# Allegro board PoFA1-16.brd
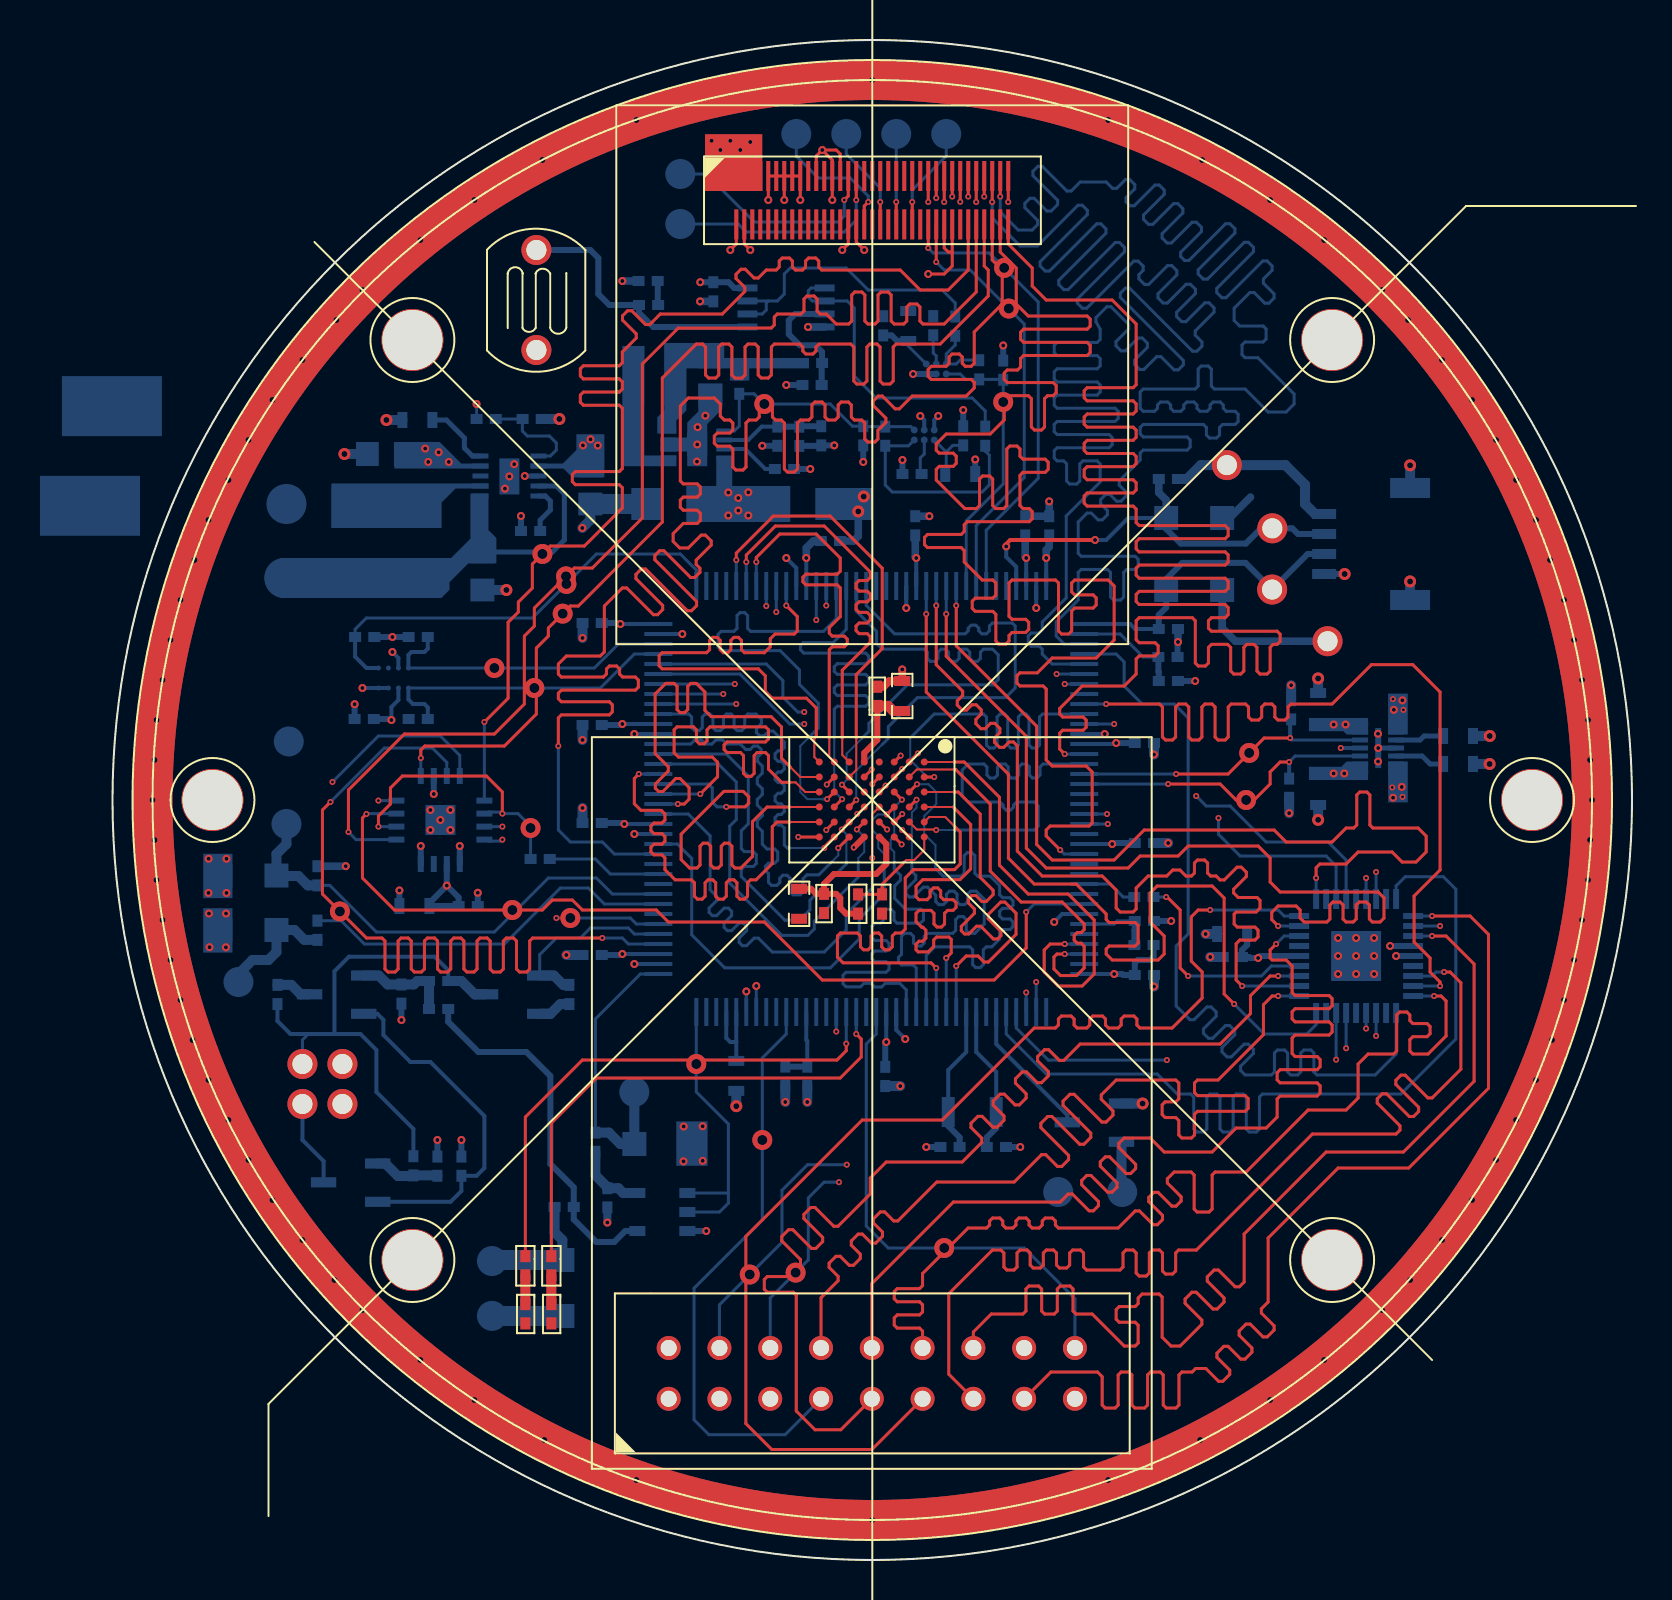
[diagram p0: board, top side]
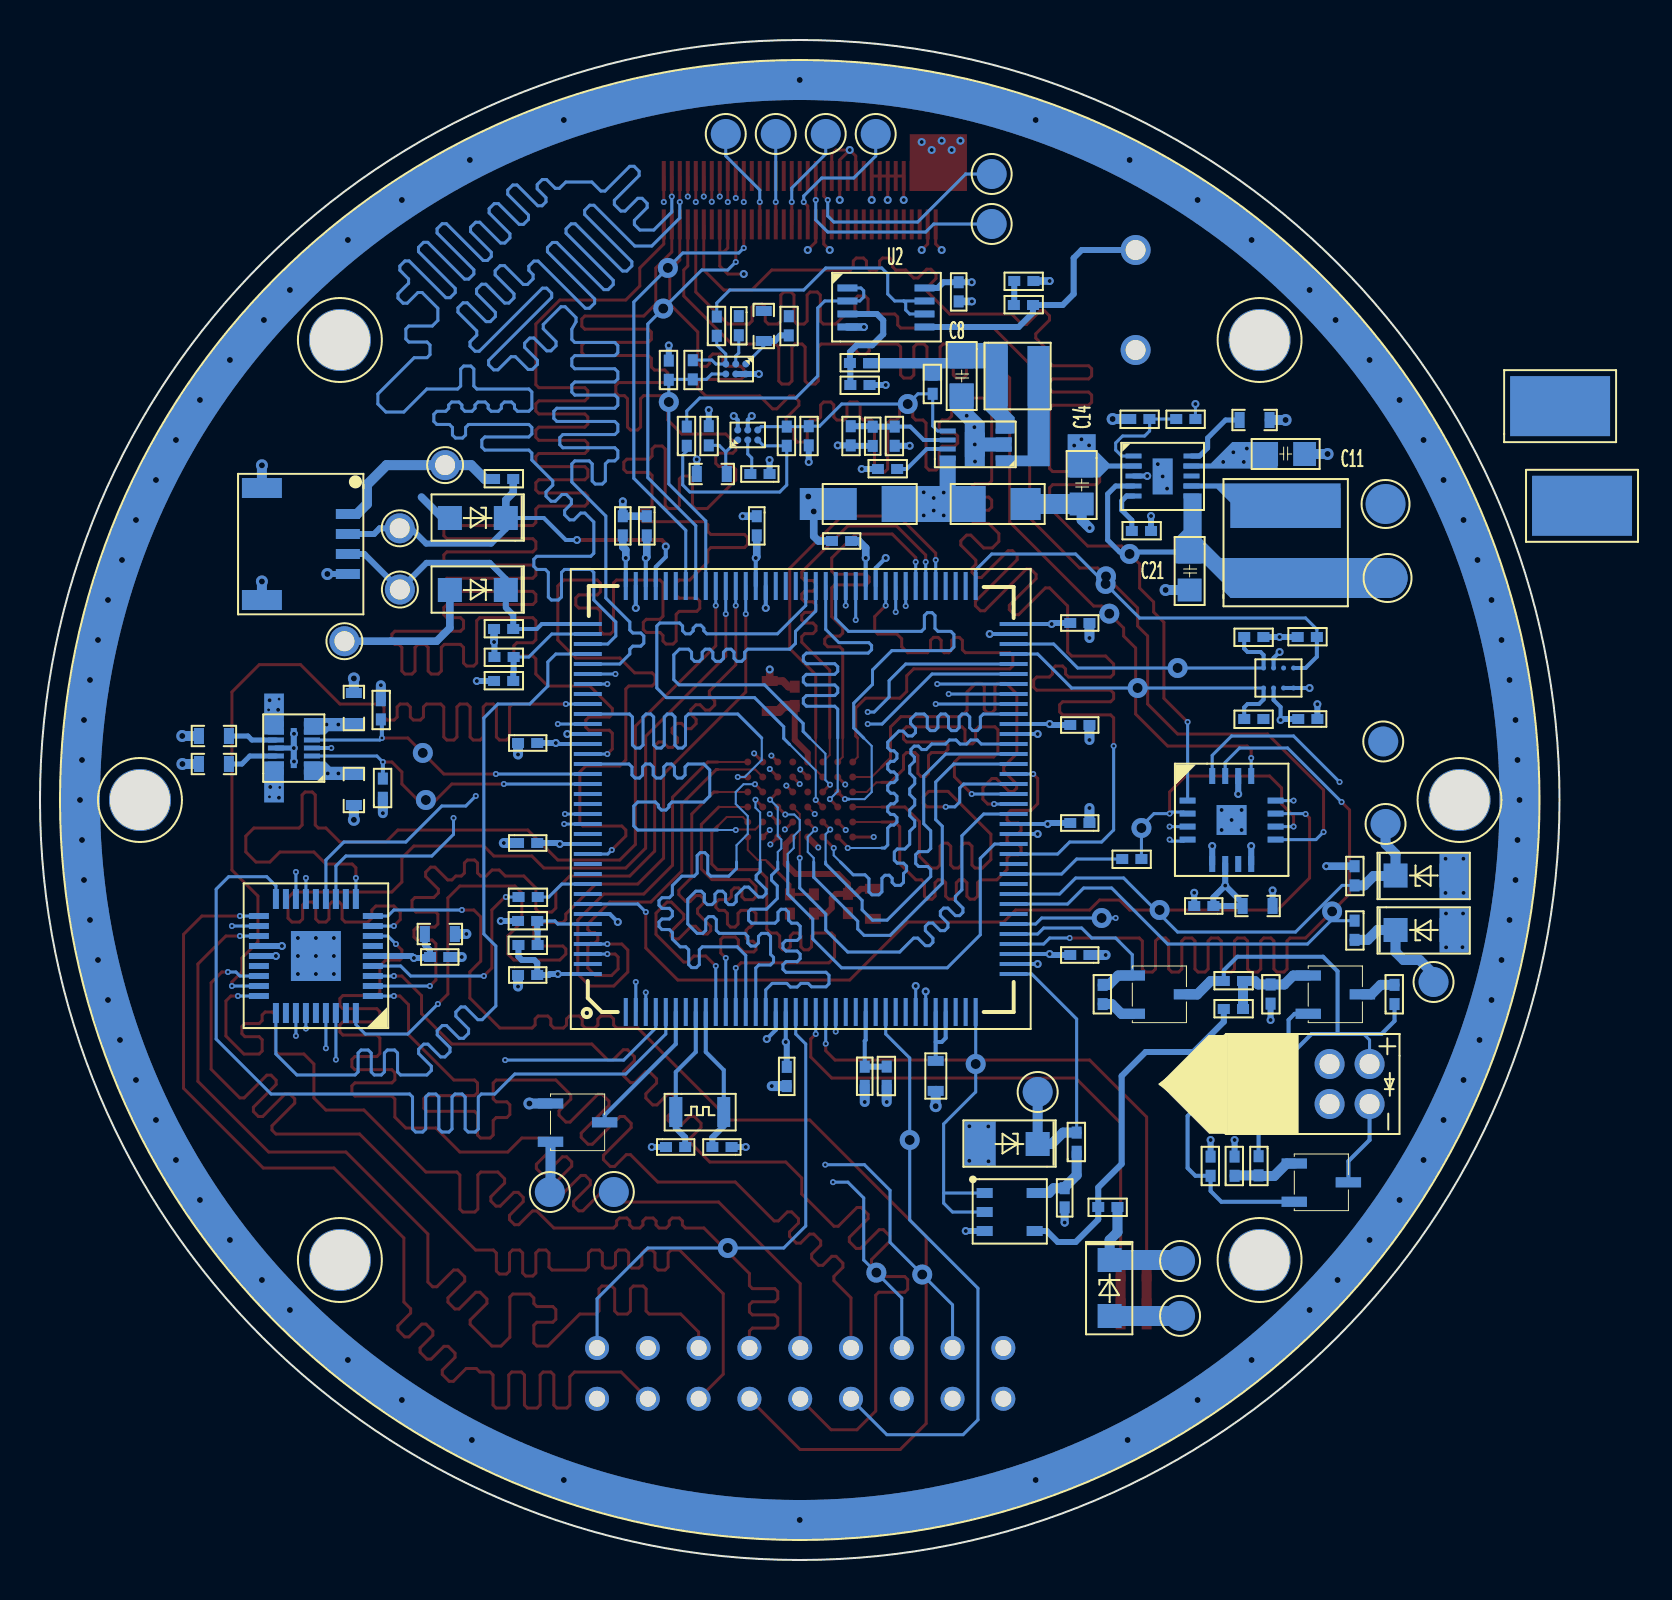
[diagram p1: board, bottom side, seen from below]

Outline 76 x 76 mm; copper layers: TOP, GND, VCC, BOTTOM. Coordinates in mm from the lower left corner of the outline.
Outline path: circle c38,38 r38

## Design rules (mm)
constraint set DEFAULT: min track width 0.15
net group BUS_SWITCH: nets BUS_SWITCH N57182
net group N00115: nets N00115 N00127
net group SYNC_SWITCH: nets N94378 SYNC_SWITCH
net group UART3_TX: nets N169854 UART3_TX
net group VPHOTO: nets N83192 VPHOTO
net group CAM1_SIGNAL: nets CAM1_D0 CAM1_D1 CAM1_D2 CAM1_D3 CAM1_D4 CAM1_D5 CAM1_D6 CAM1_D7 CAM1_HSYNC CAM1_PCLK CAM1_VSYNC
net group CAM2_SIGNAL: nets CAM2_D0 CAM2_D1 CAM2_D2 CAM2_D3 CAM2_D4 CAM2_D5 CAM2_D6 CAM2_D7 CAM2_HSYNC CAM2_PCLK CAM2_VSYNC
net group DAY_NIGHT: nets DAY_NIGHT N16602 N16606
net group DCMI_BUS: nets DCMI_D0 DCMI_D1 DCMI_D2 DCMI_D3 DCMI_D4 DCMI_D5 DCMI_D6 DCMI_D7 DCMI_HSYNC DCMI_PIXCLK DCMI_VSYNC
net group LDO22: nets LDO22 N00530 N02509 N04876 N06131 N06552 N13003 UNDER_VOLTAGE VCAP
net group MG1_DATA_BUS: nets FMC_D0 FMC_D1 FMC_D2 FMC_D3 FMC_D4 FMC_D5 FMC_D6 FMC_D7 FMC_D8 FMC_D9 FMC_D10 FMC_D11 FMC_D12 FMC_D13 FMC_D14 FMC_D15 FMC_NBL0 FMC_NBL1 FMC_NE1 FMC_NOE FMC_NWE
net group MG2_ADDR_BUS: nets FMC_A0 FMC_A1 FMC_A2 FMC_A3 FMC_A4 FMC_A5 FMC_A6 FMC_A7 FMC_A8 FMC_A9 FMC_A10 FMC_A11 FMC_A12 FMC_A13 FMC_A14 FMC_A15 FMC_A16 FMC_A17 FMC_A18 FMC_A19 FMC_A20
net group N112361: nets N66919 N67019 N67360 N69262 N70908 N112361
net group OTHER_DATA_BUS: nets DCMI_D8 DCMI_D9 DCMI_D10 DCMI_D11 DCMI_D12 DCMI_D13

## Placement (name value [footprint] x y rotation side)
C1  0.1uF  [C0402]  38.5 42.7 90 top
C2  10uF  [C0603]  39.9 42.4 90 top
C3  10uF  [C0603]  33.94 33.61 270 top
C4  0.1uF  [C0402]  35.34 33.31 270 top
C5  0.1uF  [C0402]  30.3 63.9 270 bottom
C6  0.1uF  [C0402]  41.3 62.2 270 bottom
C7  2.2uF  [C0603]  40.2 62.5 270 bottom
C8  10uF  [C0805]  30.5 60.25 270 bottom
C9  1uF  [C0603]  16.05 56.6 180 bottom
C10  33pF  [C0402]  34.1 55.7 90 bottom
C11  10uF  [C0805]  14.75 54.7 180 bottom
C12  2.2uF  [C0603]  43.2 53.9 180 bottom
C13  0.1uF  [C0402]  39.5 54.55 0 bottom
C14  10uF  [C0805]  24.5 54.8 270 bottom
C15  22uF  [C1206]  32.9 53.6 0 bottom
C16  22uF  [C1206]  29.7 52 180 bottom
C17  0.1uF  [C0402]  47.1 52.2 270 bottom
C18  0.1uF  [C0402]  45.9 52.2 270 bottom
C19  0.1uF  [C0402]  40.4 52.2 270 bottom
C20  0.1uF  [C0402]  36.4 50.7 180 bottom
C21  10uF  [C0805]  19.1 50.5 270 bottom
C22  0.1uF  [C0402]  23.5 47.1 0 bottom
C23  1uF  [C0603]  60.7 43.4 270 bottom
C24  0.1uF  [C0402]  12.1 42.3 0 bottom
C25  0.1uF  [C0402]  23.5 42 0 bottom
C26  1uF  [C0603]  66.5 41.6 0 bottom
C27  0.1uF  [C0402]  52.1 40.6 180 bottom
C28  1uF  [C0603]  66.5 40.2 0 bottom
C29  1uF  [C0603]  59.9 37.7 90 bottom
C30  0.1uF  [C0402]  23.5 37.1 0 bottom
C31  0.1uF  [C0402]  52.1 35.6 180 bottom
C32  0.1uF  [C0402]  17.3 32.95 0 bottom
C33  10uF  [C0603]  15.9 32.3 180 bottom
C34  10uF  [C0603]  56.8 30.9 180 bottom
C35  0.1uF  [C0402]  23.5 30.5 0 bottom
C36  0.1uF  [C0402]  56.5 29.9 180 bottom
C37  0.1uF  [C0402]  52.1 29 180 bottom
C38  0.1uF  [C0402]  34.5 23.7 90 bottom
C39  0.1uF  [C0402]  38.4 23.69 90 bottom
C40  12pF  [C0402]  44.7 20.4 180 bottom
C41  12pF  [C0402]  41.4 20.9 0 bottom
C42  0.1uF  [C0402]  25 18.6 270 bottom
D1  LED  [LED0402]  20.4 15.2 270 top
D2  LED  [LED0402]  21.7 15.2 270 top
D3  PTVS3V3S1UTR  [SOD123W]  52.7 52.1 0 bottom
D4  PTVS3V3S1UTR  [SOD123W]  52.7 48.5 0 bottom
D5  PTVS3V3S1UTR  [SOD123W]  8.2 34.22 180 bottom
D6  PTVS3V3S1UTR  [SOD123W]  8.2 31.5 180 bottom
D7  PTVS3V3S1UTR  [SOD123W]  26.1 20.8 0 bottom
D8  PTVS3V3S1UTR  [SOD123W]  22.5 15 270 bottom
J1  DF40HC(3.0)-70DS-0.4V(51)  [DF40HC-70DS]  31.2 69.2 0 top
J2  Header2x9-2.54mm  [HEADER2X9-2D54]  27.82 10.6 0 top
J3  CONN_SH1.0mm_4P  [CONN_SH1D0MM_4P]  60.6 52.3 270 bottom
L1  4.7uH  [L3015]  28.1 59.2 180 bottom
L2  10uH  [L47473]  13.7 49.1 90 bottom
L3  1uH  [L0603]  31.6 25.01 270 bottom
LD1  LaserDiode  [AXIAL_2D0_4P]  9.5 24.8 270 bottom
NOREF  -  []  15 61 0 top
NOREF#2  -  [unnamed#2]  61 15 0 top
NOREF#3  -  [unnamed#2]  71 38 0 top
NOREF#4  -  [unnamed#2]  15 15 0 top
NOREF#5  -  []  5 38 0 top
NOREF#6  -  [unnamed#2]  61 61 0 top
NOREF#7  -  []  15 15 90 top
NOREF#8  -  [unnamed#2]  5 38 0 top
NOREF#9  -  [unnamed#2]  15 61 0 top
NOREF#10  -  []  69.87 58.69 0 top
Q1  FH3415A  [SOT23-3]  21.8 29.7 270 bottom
Q2  2SC1815  [SOT23-3]  13 29.7 270 bottom
Q3  2SC1815  [SOT23-3]  13.7 20.3 270 bottom
R1  GL7549  [AXIAL-5D0]  21.2 60.5 90 top
R2  0  [R0402]  37.54 32.31 90 top
R3  DNP  [R0402]  38.74 32.31 90 top
R4  2K  [R0402]  20.4 12.8 270 top
R5  2K  [R0402]  21.7 12.8 270 top
R6  68K  [R0402]  26.3 64.2 0 bottom
R7  0  [R0402]  27.3 62.5 180 bottom
R8  36K  [R0402]  41.9 61.2 90 bottom
R9  3.3K  [R0402]  38.8 62.2 270 bottom
R10  1M  [R0402]  35.5 59.6 180 bottom
R11  10K  [R0402]  44.3 59 90 bottom
R12  147K  [R0402]  43.6 60 270 bottom
R13  10K  [R0402]  31.1 58.3 90 bottom
R14  1M  [R0402]  34.5 59 0 bottom
R15  1M  [R0402]  20.5 57.3 0 bottom
R16  2.26M  [R0402]  18.2 57.3 0 bottom
R17  36K  [R0402]  43.4 55.7 90 bottom
R18  3.3K  [R0402]  42.8 56.7 270 bottom
R19  147K  [R0402]  38.4 55.7 90 bottom
R20  10K  [R0402]  37.8 56.7 270 bottom
R21  1M  [R0402]  35.7 56.7 270 bottom
R22  562K  [R0402]  33 55.7 90 bottom
R23  10K  [R0402]  34.1 54.3 180 bottom
R24  10K  [R0402]  53.3 53.8 180 bottom
R25  200K  [R0402]  21.4 51.2 180 bottom
R26  10K  [R0402]  53.3 46.3 180 bottom
R27  10K  [R0402]  13.11 45.9 180 bottom
R28  10K  [R0402]  14.8 46.4 0 bottom
R29  10K  [R0402]  52.3 45.4 0 bottom
R30  DNP  [R0402]  53.3 43.7 180 bottom
R31  100K  [R0402]  59.2 43 270 bottom
R32  10K  [R0402]  14.8 42.3 0 bottom
R33  100K  [R0402]  58.6 38.1 90 bottom
R34  1K  [R0402]  20.9 35.3 0 bottom
R35  10K  [R0402]  10.5 34.7 270 bottom
R36  1K  [R0402]  51.09 33.4 0 bottom
R37  DNP  [R0402]  52.1 31.7 180 bottom
R38  10K  [R0402]  10.5 31.98 270 bottom
R39  10K  [R0402]  51.1 31 0 bottom
R40  510  [R0402]  16.8 28.7 180 bottom
R41  10K  [R0402]  22.6 27.79 90 bottom
R42  510  [R0402]  14.7 28.79 270 bottom
R43  40  [R0402]  8 27.79 90 bottom
R44  510  [R0402]  16.8 27.3 180 bottom
R45  10K  [R0402]  33.4 23.7 90 bottom
R46  10K  [R0402]  23.9 20.4 90 bottom
R47  40  [R0402]  17.2 19.2 90 bottom
R48  510  [R0402]  16 19.2 90 bottom
R49  510  [R0402]  15.3 20.2 270 bottom
R50  10K  [R0402]  22.1 17.9 0 bottom
TP1  SMD TP  [TP_SMD_OD1D5]  41.7 71.3 180 bottom
TP2  SMD TP  [TP_SMD_OD1D5]  39.2 71.3 180 bottom
TP3  SMD TP  [TP_SMD_OD1D5]  36.7 71.3 180 bottom
TP4  SMD TP  [TP_SMD_OD1D5]  34.2 71.3 180 bottom
TP5  SMD TP  [TP_SMD_OD1D5]  28.4 69.3 180 bottom
TP6  SMD TP  [TP_SMD_OD1D5]  28.4 66.8 180 bottom
TP7  SOLDER POINT  [TP_SMD_3D0X5D0]  -0.03 57.69 90 bottom
TP8  SMD TP  [TP_THR_ID1D0]  55.74 54.75 180 bottom
TP9  Solar Cell V-  [TP_SMD_OD2D0]  8.7 52.8 180 bottom
TP10  SOLDER POINT  [TP_SMD_3D0X5D0]  -1.13 52.71 270 bottom
TP11  SMD TP  [TP_THR_ID1D0]  58.01 51.59 180 bottom
TP12  Solar Cell V+  [TP_SMD_OD2D0]  8.6 49.1 180 bottom
TP13  SMD TP  [TP_THR_ID1D0]  58 48.52 180 bottom
TP14  SMD TP  [TP_THR_ID1D0]  60.77 45.94 180 bottom
TP15  SMD TP  [TP_SMD_OD1D5]  8.82 40.93 180 bottom
TP16  SMD TP  [TP_SMD_OD1D5]  8.7 36.8 180 bottom
TP17  SMD TP  [TP_SMD_OD1D5]  6.3 28.9 180 bottom
TP18  SMD TP  [TP_SMD_OD1D5]  26.1 23.4 180 bottom
TP19  SMD TP  [TP_SMD_OD1D5]  50.5 18.4 180 bottom
TP20  SMD TP  [TP_SMD_OD1D5]  47.3 18.4 180 bottom
TP21  SMD TP  [TP_SMD_OD1D5]  18.98 14.95 180 bottom
TP22  SMD TP  [TP_SMD_OD1D5]  18.98 12.21 180 bottom
U1  IS66WVE2M16EBLL-70BLI-TR  [TFBGA-48]  40.6 39.9 270 top
U2  ADA4051-2ARMZ  [RM-8]  32 63.6 270 bottom
U3  ADCMP380-1ACBZ-RL7  [WLCSP-6]  40.7 59.8 270 bottom
U4  ADCMP380-1ACBZ-RL7  [WLCSP-6]  41.1 56 90 bottom
U5  LTC3539EDCB#PBF  [DFN-8]  30.6 55.1 90 bottom
U6  LTC3105EDD#PBF  [DFN-10]  18.41 55.2 270 bottom
U7  HDC1010YPAR  [DSBGA-8]  14.8 43.6 90 bottom
U8  TPS22976ADPUR  [WSON-14]  64.2 39.4 90 bottom
U9  STM32L496ZGT6  [LQFP-144]  47.9 28.1 180 bottom
U10  MAX4754AEBE+T  [QFN-16]  16.4 37 180 bottom
U11  MAX4761ETX+T  [TQFN-36]  62.2 30.2 0 bottom
U12  BAT754C  [SOT23-3]  50.9 23.3 270 bottom
U13  SN74LVC1G08QDBVRQ1  [SOT-23-5]  29 15.9 180 bottom
Y1  32.768KHz  [CRYSTAL_3215]  44.2 22.4 180 bottom

## Library data of the parts
C1 C4-C6 C13 C17-C20 C22 C24 C25 C27 C30-C32 C35-C39 C42 = CAP NP: signal model: DEFAULT_CAPACITOR_100000pF_2_1
C2 C3 C8 C11 C14 C21 C33 C34 = CAP NP: signal model: DEFAULT_CAPACITOR_1e+07pF_2_1
C7 C12 = CAP NP: signal model: DEFAULT_CAPACITOR_2.2e+06pF_2_1
C9 C23 C26 C28 C29 = CAP NP: signal model: DEFAULT_CAPACITOR_1e+06pF_2_1
C10 = CAP NP: signal model: DEFAULT_CAPACITOR_33.000000pF_2_1
C15 C16 = CAP NP: signal model: DEFAULT_CAPACITOR_2.2e+07pF_2_1
C40 C41 = CAP NP: signal model: DEFAULT_CAPACITOR_12.000000pF_2_1
D1 D2 = LED
D3-D8 = DIODE TVS
J1 = Header2x35
J2 = Header2x9
J3 = CONN_SH1.0mm_4P
L1 = INDUCTOR: signal model: DEFAULT_INDUCTOR_4700nH_2_1
L2 = INDUCTOR: signal model: DEFAULT_INDUCTOR_10000nH_2_1
L3 = INDUCTOR: signal model: DEFAULT_INDUCTOR_1000nH_2_1
LD1 = LaserDiode
Q1 = FH3415A
Q2 Q3 = 2SC1815
R1 = RESISTOR VAR 2
R2 R10 R14 R15 R21 = R: signal model: DEFAULT_RESISTOR_0.001OHM_2_1
R3 R30 R37 = R
R4 R5 = R: signal model: DEFAULT_RESISTOR_2000OHM_2_1
R6 = R: signal model: DEFAULT_RESISTOR_68000OHM_2_1
R7 = R: signal model: R_R0402_0_0
R8 R17 = R: signal model: DEFAULT_RESISTOR_36000OHM_2_1
R9 R18 = R: signal model: DEFAULT_RESISTOR_3300OHM_2_1
R11 R13 R20 R23 R24 R26-R29 R32 R35 R38 R39 R41 R45 R46 R50 = R: signal model: DEFAULT_RESISTOR_10000OHM_2_1
R12 R19 = R: signal model: DEFAULT_RESISTOR_147000OHM_2_1
R16 = R: signal model: DEFAULT_RESISTOR_0.00226OHM_2_1
R22 = R: signal model: DEFAULT_RESISTOR_562000OHM_2_1
R25 = R: signal model: DEFAULT_RESISTOR_200000OHM_2_1
R31 R33 = R: signal model: DEFAULT_RESISTOR_100000OHM_2_1
R34 R36 = R: signal model: DEFAULT_RESISTOR_1000.000000OHM_2_1
R40 R42 R44 R48 R49 = R: signal model: DEFAULT_RESISTOR_510.000000OHM_2_1
R43 R47 = R: signal model: DEFAULT_RESISTOR_40.000000OHM_2_1
TP1-TP6 TP8 TP11 TP13-TP22 = T POINT R
TP7 TP10 = T POINT S
TP9 TP12 = T POINT A
U1 = IS66WVE2M16EBLL-70BLI-TR
U2 = ADA4051-2ARMZ
U3 U4 = ADCMP380-1ACBZ-RL7
U5 = LTC3539EDCB#PBF
U6 = LTC3105EDD#PBF
U7 = HDC1010YPAR
U8 = TPS22976ADPUR
U9 = STM32L496ZGT6
U10 = MAX4754AEBE+T
U11 = MAX4761EBX+T
U12 = BAT754C
U13 = SN74LVC1G08QDBVRQ1
Y1 = CRYSTAL

## Footprints (pads in the part's own frame, mm; a bottom-side part is the same pattern mirrored in y, then rotated)
AXIAL-5D0
  round 1.5 hole 1: 1(0,0) 2(5,0)
AXIAL_2D0_4P
  round 1.5 hole 1: 1(0,0) 2(2,0) 3(0,-2) 4(2,-2)
C0402
  rect 0.6x0.5 smd: 1(0.01,0.25) 2(0.97,0.25)
C0603
  rect 0.5x0.8 smd: 1(0.05,0.4) 2(1.55,0.4)
C0805
  rect 1.14x1.2 smd: 1(0.1,0.6) 2(2,0.6)
C1206
  rect 1.5x1.6 smd: 1(0.2,0.8) 2(3,0.8)
CONN_SH1D0MM_4P
  rect 0.5x1.2 smd: 1(0,0) 2(1,0) 3(2,0) 4(3,0)
  rect 1x2 smd: 5(-1.3,-4.3) 6(4.3,-4.3)
CRYSTAL_3215
  rect 0.65x1.5 smd: 1(0,0) 2(2.4,0)
DF40HC-70DS
  rect 0.2x1.5 smd: 1(0,0) 2(0.4,0) 3(0.8,0) 4(1.2,0) 5(1.6,0) 6(2,0) 7(2.4,0) 8(2.8,0) 9(3.2,0) 10(3.6,0) 11(4,0) 12(4.4,0) 13(4.8,0) 14(5.2,0) 15(5.6,0) 16(6,0) 17(6.4,0) 18(6.8,0) 19(7.2,0) 20(7.6,0) 21(8,0) 22(8.4,0) 23(8.8,0) 24(9.2,0) 25(9.6,0) 26(10,0) 27(10.4,0) 28(10.8,0) 29(11.2,0) 30(11.6,0) 31(12,0) 32(12.4,0) 33(12.8,0) 34(13.2,0) 35(13.6,0) 36(13.6,-2.42) 37(13.2,-2.42) 38(12.8,-2.42) 39(12.4,-2.42) 40(12,-2.42) 41(11.6,-2.42) 42(11.2,-2.42) 43(10.8,-2.42) 44(10.4,-2.42) 45(10,-2.42) 46(9.6,-2.42) 47(9.2,-2.42) 48(8.8,-2.42) 49(8.4,-2.42) 50(8,-2.42) 51(7.6,-2.42) 52(7.2,-2.42) 53(6.8,-2.42) 54(6.4,-2.42) 55(6,-2.42) 56(5.6,-2.42) 57(5.2,-2.42) 58(4.8,-2.42) 59(4.4,-2.42) 60(4,-2.42) 61(3.6,-2.42) 62(3.2,-2.42) 63(2.8,-2.42) 64(2.4,-2.42) 65(2,-2.42) 66(1.6,-2.42) 67(1.2,-2.42) 68(0.8,-2.42) 69(0.4,-2.42) 70(0,-2.42)
DFN-8
  rect 0.25x0.8 smd: 1(0,-2.8) 2(0.45,-2.8) 3(0.9,-2.8) 4(1.35,-2.8) 5(1.35,0) 6(0.9,0) 7(0.45,0) 8(0,0)
  rect 1.2x1 smd: 9(0.676,-1.355)
DFN-10
  rect 0.25x0.8 smd: 1(0,-2.9) 2(0.5,-2.9) 3(1,-2.9) 4(1.5,-2.9) 5(2,-2.9) 6(2,0) 7(1.5,0) 8(1,0) 9(0.5,0) 10(0,0)
  rect 1.8x1 smd: 11(1.022,-1.444)
DSBGA-8
  round 0.25 smd: A1(0,0) A2(1,0) B1(0,-0.5) B2(1,-0.5) C1(0,-1) C2(1,-1) D1(0,-1.5) D2(1,-1.5)
HEADER2X9-2D54
  round 1.2 hole 0.8: 1(0,-2.54) 2(2.54,-2.54) 3(5.08,-2.54) 4(7.62,-2.54) 5(10.16,-2.54) 6(12.7,-2.54) 7(15.24,-2.54) 8(17.78,-2.54) 9(20.32,-2.54) 10(20.32,0) 11(17.78,0) 12(15.24,0) 13(12.7,0) 14(10.16,0) 15(7.62,0) 16(5.08,0) 17(2.54,0) 18(0,0)
L0603
  rect 0.5x0.8 smd: 1(0.05,0.4) 2(1.55,0.4)
L3015
  rect 1x3 smd: 1(0,0) 2(2,0)
L47473
  rect 2x5.5 smd: 1(0,0) 2(3.5,0)
LED0402
  rect 0.6x0.5 smd: 1(0.01,0.25) 2(0.97,0.25)
LQFP-144
  rect 0.2x1.4 smd: 1(1.2,-0.7) 2(1.7,-0.7) 3(2.2,-0.7) 4(2.7,-0.7) 5(3.2,-0.7) 6(3.7,-0.7) 7(4.2,-0.7) 8(4.7,-0.7) 9(5.2,-0.7) 10(5.7,-0.7) 11(6.2,-0.7) 12(6.7,-0.7) 13(7.2,-0.7) 14(7.7,-0.7) 15(8.2,-0.7) 16(8.7,-0.7) 17(9.2,-0.7) 18(9.7,-0.7) 19(10.2,-0.7) 20(10.7,-0.7) 21(11.2,-0.7) 22(11.7,-0.7) 23(12.2,-0.7) 24(12.7,-0.7) 25(13.2,-0.7) 26(13.7,-0.7) 27(14.2,-0.7) 28(14.7,-0.7) 29(15.2,-0.7) 30(15.7,-0.7) 31(16.2,-0.7) 32(16.7,-0.7) 33(17.2,-0.7) 34(17.7,-0.7) 35(18.2,-0.7) 36(18.7,-0.7) 73(18.7,20.6) 74(18.2,20.6) 75(17.7,20.6) 76(17.2,20.6) 77(16.7,20.6) 78(16.2,20.6) 79(15.7,20.6) 80(15.2,20.6) 81(14.7,20.6) 82(14.2,20.6) 83(13.7,20.6) 84(13.2,20.6) 85(12.7,20.6) 86(12.2,20.6) 87(11.7,20.6) 88(11.2,20.6) 89(10.7,20.6) 90(10.2,20.6) 91(9.7,20.6) 92(9.2,20.6) 93(8.7,20.6) 94(8.2,20.6) 95(7.7,20.6) 96(7.2,20.6) 97(6.7,20.6) 98(6.2,20.6) 99(5.7,20.6) 100(5.2,20.6) 101(4.7,20.6) 102(4.2,20.6) 103(3.7,20.6) 104(3.2,20.6) 105(2.7,20.6) 106(2.2,20.6) 107(1.7,20.6) 108(1.2,20.6)
  rect 1.4x0.2 smd: 37(20.6,1.2) 38(20.6,1.7) 39(20.6,2.2) 40(20.6,2.7) 41(20.6,3.2) 42(20.6,3.7) 43(20.6,4.2) 44(20.6,4.7) 45(20.6,5.2) 46(20.6,5.7) 47(20.6,6.2) 48(20.6,6.7) 49(20.6,7.2) 50(20.6,7.7) 51(20.6,8.2) 52(20.6,8.7) 53(20.6,9.2) 54(20.6,9.7) 55(20.6,10.2) 56(20.6,10.7) 57(20.6,11.2) 58(20.6,11.7) 59(20.6,12.2) 60(20.6,12.7) 61(20.6,13.2) 62(20.6,13.7) 63(20.6,14.2) 64(20.6,14.7) 65(20.6,15.2) 66(20.6,15.7) 67(20.6,16.2) 68(20.6,16.7) 69(20.6,17.2) 70(20.6,17.7) 71(20.6,18.2) 72(20.6,18.7) 109(-0.7,18.7) 110(-0.7,18.2) 111(-0.7,17.7) 112(-0.7,17.2) 113(-0.7,16.7) 114(-0.7,16.2) 115(-0.7,15.7) 116(-0.7,15.2) 117(-0.7,14.7) 118(-0.7,14.2) 119(-0.7,13.7) 120(-0.7,13.2) 121(-0.7,12.7) 122(-0.7,12.2) 123(-0.7,11.7) 124(-0.7,11.2) 125(-0.7,10.7) 126(-0.7,10.2) 127(-0.7,9.7) 128(-0.7,9.2) 129(-0.7,8.7) 130(-0.7,8.2) 131(-0.7,7.7) 132(-0.7,7.2) 133(-0.7,6.7) 134(-0.7,6.2) 135(-0.7,5.7) 136(-0.7,5.2) 137(-0.7,4.7) 138(-0.7,4.2) 139(-0.7,3.7) 140(-0.7,3.2) 141(-0.7,2.7) 142(-0.7,2.2) 143(-0.7,1.7) 144(-0.7,1.2)
QFN-16
  rect 0.8x0.3 smd: 1(-2.2,0.97) 2(-2.2,0.32) 3(-2.2,-0.33) 4(-2.2,-0.98) 9(2.2,-0.98) 10(2.2,-0.33) 11(2.2,0.32) 12(2.2,0.97)
  rect 0.3x0.8 smd: 5(-0.97,-2.2) 6(-0.32,-2.2) 7(0.33,-2.2) 8(0.98,-2.2) 13(0.98,2.2) 14(0.33,2.2) 15(-0.32,2.2) 16(-0.97,2.2)
  rect 1.5x1.5 smd: EPAD(0,0)
R0402
  rect 0.6x0.5 smd: 1(0.01,0.25) 2(0.97,0.25)
RM-8
  rect 0.35x1 smd: 1(-0.001,-3.615) 2(0.649,-3.615) 3(1.299,-3.615) 4(1.949,-3.615) 5(1.949,0.241) 6(1.299,0.241) 7(0.649,0.241) 8(-0.001,0.241)
SOD123W
  rect 1.2x1.2 smd: 1(0,0) 2(2.8,0)
SOT23-3
  rect 0.51x1.27 smd: 1(0.476,0.434) 2(2.391,0.434) 3(1.415,3.142)
SOT-23-5
  rect 0.8x0.5 smd: 1(0.25,2.45) 2(0.25,1.5) 3(0.25,0.55) 4(2.75,0.55) 5(2.75,2.45)
TFBGA-48
  round 0.35 smd: A1(0,0) A2(0.75,0) A3(1.5,0) A4(2.25,0) A5(3,0) A6(3.75,0) B1(0,-0.75) B2(0.75,-0.75) B3(1.5,-0.75) B4(2.25,-0.75) B5(3,-0.75) B6(3.75,-0.75) C1(0,-1.5) C2(0.75,-1.5) C3(1.5,-1.5) C4(2.25,-1.5) C5(3,-1.5) C6(3.75,-1.5) D1(0,-2.25) D2(0.75,-2.25) D3(1.5,-2.25) D4(2.25,-2.25) D5(3,-2.25) D6(3.75,-2.25) E1(0,-3) E2(0.75,-3) E3(1.5,-3) E4(2.25,-3) E5(3,-3) E6(3.75,-3) F1(0,-3.75) F2(0.75,-3.75) F3(1.5,-3.75) F4(2.25,-3.75) F5(3,-3.75) F6(3.75,-3.75) G1(0,-4.5) G2(0.75,-4.5) G3(1.5,-4.5) G4(2.25,-4.5) G5(3,-4.5) G6(3.75,-4.5) H1(0,-5.25) H2(0.75,-5.25) H3(1.5,-5.25) H4(2.25,-5.25) H5(3,-5.25) H6(3.75,-5.25)
TP_SMD_3D0X5D0
  rect 3x5 smd: 1(0,0)
TP_SMD_OD1D5
  round 1.5 smd: 1(0,0)
TP_SMD_OD2D0
  round 2 smd: 1(0,0)
TP_THR_ID1D0
  round 1.5 hole 1: 1(0,0)
TQFN-36
  rect 1x0.3 smd: 1(-2.85,2) 2(-2.85,1.5) 3(-2.85,1) 4(-2.85,0.5) 5(-2.85,0) 6(-2.85,-0.5) 7(-2.85,-1) 8(-2.85,-1.5) 9(-2.85,-2) 19(2.85,-2) 20(2.85,-1.5) 21(2.85,-1) 22(2.85,-0.5) 23(2.85,0) 24(2.85,0.5) 25(2.85,1) 26(2.85,1.5) 27(2.85,2)
  rect 0.3x1 smd: 10(-2,-2.85) 11(-1.5,-2.85) 12(-1,-2.85) 13(-0.5,-2.85) 14(0,-2.85) 15(0.5,-2.85) 16(1,-2.85) 17(1.5,-2.85) 18(2,-2.85) 28(2,2.85) 29(1.5,2.85) 30(1,2.85) 31(0.5,2.85) 32(0,2.85) 33(-0.5,2.85) 34(-1,2.85) 35(-1.5,2.85) 36(-2,2.85)
  rect 2.5x2.5 smd: EPAD(0,0)
unnamed#2
  round 3.1 hole 3 unplated: (0,0)
WLCSP-6
  round 0.35 smd: A1(0,0) A2(0.5,0) B1(0,-0.5) B2(0.5,-0.5) C1(0,-1) C2(0.5,-1)
WSON-14
  rect 0.25x0.8 smd: 1(0,-1.8) 2(0.4,-1.8) 3(0.8,-1.8) 4(1.2,-1.8) 5(1.6,-1.8) 6(2,-1.8) 7(2.4,-1.8) 8(2.4,0) 9(2,0) 10(1.6,0) 11(1.2,0) 12(0.8,0) 13(0.4,0) 14(0,0)
  rect 2x0.3 smd: EPAD(1.197,-0.895)

## Nets
GND: C1.2 C2.2 C3.2 C4.2 C5.2 C6.1 C7.1 C8.2 C9.2 C11.2 C12.1 C13.1 C14.2 C15.2 C16.2 C17.1 C18.1 C19.1 C20.1 C21.2 C22.1 C23.1 C24.1 C25.1 C26.2 C27.1 C28.2 C29.1 C30.1 C31.1 C32.2 C33.2 C34.2 C35.1 C36.2 C37.1 C38.1 C39.1 C40.1 C41.1 C42.2 D3.2 D4.2 D5.2 D6.2 D7.2 D8.2 J1.5 J1.6 J1.7 J1.8 J1.9 J1.11 J1.13 J1.14 J1.43 J1.44 J1.55 J1.56 J1.69 J1.70 J2.18 J3.4 J3.5 J3.6 R3.1 R6.1 R14.1 R15.2 R22.1 R23.1 R25.2 R30.1 R31.1 R33.1 R37.1 R42.2 R47.2 R48.2 TP9.1(TP) TP10.1(TP) TP14.1(TP) TP15.1(TP) TP20.1(TP) TP22.1(TP) U1.D1 U1.E6 U2.4(V-) U3.A2 U3.B2 U4.A2 U4.B2 U5.2 U5.3 U5.9 U6.3 U6.11 U7.B2 U7.C1 U7.D1 U8.11 U8.EPAD U9.16 U9.30(VSSA) U9.31 U9.38 U9.51 U9.61 U9.83 U9.94 U9.107 U9.120 U9.130 U9.138 U9.143 U10.5 U10.8 U10.14 U10.EPAD U11.22 U11.23 U11.EPAD U13.3
VDD33: C1.1 C2.1 C3.1 C4.1 C10.1 C15.1 C16.1 C17.2 C18.2 C19.2 C20.2 C22.2 C23.2 C24.2 C25.2 C27.2 C29.2 C30.2 C31.2 C32.1 C33.1 C34.1 C35.2 C36.1 C37.2 C39.2 C42.1 J3.1 L3.2 Q1.2(S) R1.1 R2.1 R4.2 R5.2 R9.1 R11.2 R21.2 R24.1 R26.1 R27.1 R28.1 R29.2 R32.1 R35.1 R39.2 R41.1 R45.1 R46.1 TP8.1(TP) U1.D6 U1.E1 U5.8(VOUT) U7.B1(VDD) U8.1 U8.2 U8.4 U8.6 U8.7 U9.17 U9.39 U9.52 U9.62 U9.72 U9.84 U9.95 U9.106 U9.108 U9.121 U9.131 U9.144 U10.6(V+) U11.5(V+) U12.1 U13.5
VDD_CAM1: J2.1 U8.13 U8.14
VDD_CAM2: J1.1 J1.2 J1.3 J1.4 U8.8 U8.9(VOUT2#9)
VSS: U9.71
BUS_SWITCH: R36.1 U9.135
CAM1_D0: J2.15 U11.1
CAM1_D1: J2.5 U11.3
CAM1_D2: J2.14 U11.7
CAM1_D3: J2.6 U11.9
CAM1_D4: J2.13 U11.27
CAM1_D5: J2.7 U11.25
CAM1_D6: J2.12 U11.21
CAM1_D7: J2.8 U11.19
CAM1_HSYNC: J2.3 U10.16
CAM1_PCLK: J2.11 U10.4
CAM1_PWDN: J2.10 U9.18
CAM1_PWR_EN: R33.2 U8.3 U9.125
CAM1_RST: J2.4 U9.27
CAM1_VSYNC: J2.2(VSYNC) U10.12
CAM2_D0: J1.26 U11.33
CAM2_D1: J1.25 U11.34
CAM2_D2: J1.28 U11.12
CAM2_D3: J1.27 U11.13
CAM2_D4: J1.30 U11.31
CAM2_D5: J1.29 U11.30
CAM2_D6: J1.32 U11.16
CAM2_D7: J1.31 U11.15
CAM2_HSYNC: J1.39 U10.13
CAM2_KEY1: J1.48 TP1.1(TP)
CAM2_KEY2: J1.50 TP2.1(TP)
CAM2_KEY3: J1.52 TP3.1(TP)
CAM2_KEY4: J1.54 TP4.1(TP)
CAM2_PCLK: J1.41 U10.1
CAM2_PWR_EN: R31.2 U8.5 U9.124
CAM2_RS232_RX: J1.15 TP5.1(TP)
CAM2_RS232_TX: J1.16 TP6.1(TP)
CAM2_VSYNC: J1.40 U10.9
DAY_NIGHT: R11.1 R12.2 U3.C2 U9.100
DCMI_D0: U9.96 U11.36
DCMI_D1: U9.97 U11.2
DCMI_D2: U9.98 U11.8
DCMI_D3: U9.99 U11.10
DCMI_D4: U9.112 U11.28
DCMI_D5: U9.117 U11.26
DCMI_D6: U9.4 U11.20
DCMI_D7: U9.5 U11.18
DCMI_D8: J1.34 U9.111
DCMI_D9: J1.33 U9.113
DCMI_D10: J1.36 U9.122
DCMI_D11: J1.35 U9.22
DCMI_D12: J1.38 U9.49
DCMI_D13: J1.37 U9.132
DCMI_HSYNC: U9.40 U10.15
DCMI_PIXCLK: U9.42 U10.3
DCMI_VSYNC: U9.137 U10.11
FMC_A0: U1.A3 U9.10
FMC_A1: U1.A4 U9.11
FMC_A2: U1.A5 U9.12
FMC_A3: U1.B3 U9.13
FMC_A4: U1.B4 U9.14
FMC_A5: U1.C3 U9.15
FMC_A6: U1.C4 U9.50
FMC_A7: U1.D4 U9.53
FMC_A8: U1.H2 U9.54
FMC_A9: U1.H3 U9.55
FMC_A10: U1.H4 U9.56
FMC_A11: U1.H5 U9.57
FMC_A12: U1.G3 U9.87
FMC_A13: U1.G4 U9.88
FMC_A14: U1.F3 U9.89
FMC_A15: U1.F4 U9.90
FMC_A16: U1.E4 U9.80
FMC_A17: U1.D3 U9.81
FMC_A18: U1.H1 U9.82
FMC_A19: U1.G2 U9.2
FMC_A20: U1.H6 U9.3
FMC_D0: U1.B6 U9.85
FMC_D1: U1.C5 U9.86
FMC_D2: U1.C6 U9.114
FMC_D3: U1.D5 U9.115
FMC_D4: U1.E5 U9.58
FMC_D5: U1.F5 U9.59
FMC_D6: U1.F6 U9.60
FMC_D7: U1.G6 U9.63
FMC_D8: U1.B1 U9.64
FMC_D9: U1.C1 U9.65
FMC_D10: U1.C2 U9.66
FMC_D11: U1.D2 U9.67
FMC_D12: U1.E2 U9.68
FMC_D13: U1.F2 U9.77
FMC_D14: U1.F1 U9.78
FMC_D15: U1.G1 U9.79
FMC_NBL0: U1.A1 U9.141
FMC_NBL1: U1.B2 U9.142
FMC_NE1: U1.B5 U9.123
FMC_NOE: U1.A2 U9.118
FMC_NWE: U1.G5 U9.119
HT_DRDYN: R27.2 U7.D2 U9.73
I2C1_SCL: J2.17 U9.129
I2C1_SDA: J2.16 U9.128
I2C2_SCL: R32.2 U7.A1 U9.69
I2C2_SDA: R28.2 U7.A2 U9.70
I2C3_SCL: U9.43
LD_PWR_EN: Q1.1 R41.2 U9.41
LDO22: C5.1 C14.1 R18.1 R20.2 U2.8 U6.2
LED1: D2.1(CATHODE) U9.20
LED2: D1.1(CATHODE) U9.21
NC1: U11.6
NC2: U11.11
NC3: U11.14
NC4: U11.17
NC5: U11.24
NC6: U11.29
NC7: U11.32
NC8: U11.35
POR: C38.2 R45.2 U9.25
SWCLK: D4.1(CATHODE) J3.3 R26.2 TP13.1(TP) U9.109
SWDIO: D3.1(CATHODE) J3.2 R24.2 TP11.1(TP) U9.105
SYNC_SWITCH: R34.2 U9.47
UART1_RX: J1.46 U9.102
UART1_TX: J1.45 U9.101
UART2_RX: D7.1(CATHODE) R46.2 TP18.1(TP) U9.37
UART2_TX: U9.36 U13.1 U13.2
UART3_RX: D5.1(CATHODE) R35.2 TP16.1(TP) U9.45
UART3_TX: R38.1 U9.44
UNDER_VOLTAGE: R13.1 R19.2 R20.1 U4.C2 U5.5
VCAP: C8.1 C11.1 L1.1 R10.2 R13.2 R16.1 TP7.1(TP) U5.4 U6.9(VOUT)
VER1: R29.1 R30.2 U9.110
VER2: R37.2 R39.1 U9.139
VPHOTO: R1.2 R7.2 U2.5
N00115: L2.2 U6.7
N00127: C21.1 L2.1 TP12.1(TP) U6.4 U6.6
N00232: C9.1 U6.10
N00271: R25.1 U6.5
N00530: R15.1 R16.2 U6.1
N01950: R23.2 U5.7
N02509: L1.2 U5.1
N02830: C10.2 R21.1 R22.2 U5.6
N04876: R10.1 R14.2 U2.3
N06131: R17.1 R19.1 U4.C1
N06552: C12.2 R18.2 U4.A1(VCC)
N07653: C13.2 U4.B1
N11093: C26.1 U8.10
N11226: C28.1 U8.12
N13003: R17.2 U2.1 U2.2
N16448: C7.2 R9.2 U3.A1(VCC)
N16560: C6.2 U3.B1
N16602: R8.2 U2.6 U2.7
N16606: R8.1 R12.1 U3.C1
N57182: R36.2 U11.4
N66919: Q2.1 R40.2 R42.1 R44.2
N67019: LD1.1 Q1.3 R40.1 R43.1 R49.1
N67056: Q2.2(E) Q3.2(E) R47.1
N67360: Q3.1 R48.1 R49.2
N69262: Q2.3 R43.2
N70908: R44.1 R50.2 U13.4(Y)
N83192: R6.2 R7.1
N91897: R2.2 R3.2 U1.A6(ZZ#)
N94378: R34.1 U10.2 U10.10
N107906: D2.2 R5.1
N107910: D1.2 R4.1
N112361: D8.1(CATHODE) R50.1 TP21.1(TP)
N118997: L3.1 U9.32 U9.33
N127292: U9.6 U12.3
N127671: TP19.1(TP) U12.2
N135275: C40.2 U9.8 Y1.1
N135282: C41.2 U9.9 Y1.2
N169854: D6.1(CATHODE) R38.2 TP17.1(TP)
N271370: LD1.2 Q3.3

Pads without a net: J1 10 12 17 18 19 20 21 22 23 24 42 47 49 51 53 57 58 59 60 61 62 63 64 65 66 67 68; J2 9; LD1 3 4; U1 E3; U6 8; U7 C2; U9 1 7 19 23 24 26 28 29 34 35 46 48 74 75 76 91 92 93 103 104 116 126 127 133 134 136 140; U10 7

## Via types
v1: diameter 1, hole 0.5, TOP to BOTTOM, 21 vias
v2: diameter 0.3, hole 0.15, TOP to BOTTOM, 139 vias
v3: diameter 0.4, hole 0.2, TOP to BOTTOM, 160 vias
v4: diameter 0.6, hole 0.3, TOP to BOTTOM, 87 vias

## Routing (per net, layer and track width the routed paths; a pad name or vN(x,y) marks a point on that pad's centre or on a via; arc(x,y) is an arc through that point)
GND: length 107.7
  TOP w0.15: J1.56 36.8,65.8 v3(36.5,65.5) ; 42,65.4 41.8,65.4 41.6,65.6 J1.44 ; 42,65.4 42,64.7 41.6,64.3 v3(40.8,64.3) ; 42,65.4 J1.43 ; J1.7 J1.6 J1.5 v3(32.8,68) ; J1.7 J1.8 J1.9 v3(34.4,68) ; J1.7 v3(33.6,68) ; v3(35.5,70.5) 36.2,70.5 36.4,70.3 J1.14 ; v3(35.5,70.5) 35.2,70.2 J1.11 ; v3(35.5,70.5) 36,70 J1.13 v3(36,68) ; J1.69 31.6,65.8 v3(31.9,65.5) ; v3(37.6,65.5) 37.2,65.9 J1.55 ; v3(30.9,65.5) 31.2,65.8 J1.70
  TOP w0.3: U1.E6 v2(37.08,35.62)
  TOP w0.38: C1.2 38.56,43.66 38.85,43.95 C2.2 v3(39.5,44.53)
  BOTTOM w0.15: U9.31 v3(31.7,28.43) ; U9.30 v3(32.2,28.7)
  BOTTOM w0.2: v3(39.65,26.05) 39.2,26.5 U9.16 ; U9.94 v3(39.7,47.6) ; U9.51 v3(26.1,36.3) ; U4.B2 40.6,57 v3(40.4,57.2) ; U9.83 34.2,49.6 v3(33.7,50.1) ; U9.120 v3(49.63,41.3) ; U9.138 47.5,32.3 v3(47.1,31.9) ; U9.61 v3(26.1,41.3) ; v3(14,45.4) 14.3,45.1 U7.B2 ; v3(41.3,57.2) 41.1,57 U4.A2 ; U9.107 v3(46.2,47.6) ; U9.38 v3(26.1,29.8) ; v3(12.5,43.6) U7.D1 U7.C1
  BOTTOM w0.25: U6.3 v3(20.62,54.2) ; v3(63.3,40.6) 63.31,40.6 U8.11
  BOTTOM w0.3: v3(14.45,27) R42.2 ; v3(40.04,59.3) U3.A2 U3.B2 ; U11.22 v3(63.9,30.7) ; U10.14 v3(16.07,38.3) ; R30.1 v3(54.15,43.95) ; C40.1 v3(45.4,20.65) ; R23.1 v3(34.9,54.55) ; U10.5 v3(17.37,35.7) ; C32.2 v3(18.27,33.36) ; v3(32.5,55.71) R22.1 ; R37.1 v3(52.95,31.95) ; C13.1 v3(39.51,55) ; R47.2 v3(17.45,21) ; R48.2 v3(16.25,21) ; J3.4 v4(61.63,49.3) ; C12.1 v3(43.15,55.03) ; R14.1 v3(33.7,58.75) ; R25.2 v3(20.43,52.2) ; C24.1 v3(12.11,42.79) ; U11.23 v3(64.2,30.2) ; C41.1 v3(40.7,20.65) ; C33.2 v3(14.35,33.48) ; U13.3 v3(29.7,16.45) ; U10.8 v3(15.42,35.7)
  BOTTOM w0.38: C19.1 v3(40.85,52.19) ; U2.4 v3(34.79,61.65) ; R6.1 v3(25.5,63.95) ; D4.2 55.5,46.6 56.16,45.94 TP14.1 ; 56.92,53.14 55.87,52.1 D3.2 ; C20.1 37.06,50.95 37.3,51.19 v4(37.3,52.43) ; C5.2 v3(29.39,62.93) ; C18.1 C17.1 v3(46.85,52.93)
  BOTTOM w0.4: C42.2 v3(24.75,16.87)
  BOTTOM w0.5: C9.2 v4(13.7,57) ; C31.1 v3(52.8,35.85) ; C23.1 v4(60.3,44.08) ; C14.2 23.9,52 v3(23.5,51.6) ; C34.2 v3(54.67,31.3) ; C29.1 v4(60.3,37.01) ; C25.1 v3(23.51,41) ; C27.1 v3(52.09,40.27) ; J3.5 v4(64.9,54.73) ; R31.1 v3(58.95,43.74) ; C36.2 v3(54.9,30.15) ; J3.6 v4(64.9,48.93) ; C22.1 v3(23.51,46.1) ; R15.2 v4(22.35,57.05) ; C37.1 v3(52.09,28.67) ; C21.2 v4(19.7,48.5) ; C39.1 v3(39.4,23.7) ; R33.1 v3(58.85,37.34) ; C11.2 v4(11.6,55.3) ; C38.1 v3(34.75,22.9) ; C30.1 v3(23.51,37.6) ; C35.1 v3(22.7,30.25) ; C26.2 v4(68.89,41.2) ; C28.2 v4(68.88,39.8)
  BOTTOM w1: C16.2 C14.2 ; TP22.1 18.98,12.2 D8.2
  vias: v3(4.81,35.06) v3(4.8,33.36) v3(4.82,32.33) v3(4.85,30.64) v3(5.7,35.06) v3(5.7,33.35) v3(5.68,32.32) v3(5.67,30.63) v3(15.9,37.5) v3(15.9,36.5) v3(16.4,37) v3(16.9,37.5) v3(16.9,36.5) v3(19.63,53.57) v3(19.85,54.18) v3(20.09,54.79) v3(28.57,21.68) v3(28.56,19.93) v3(29.24,55.78) v3(29.23,54.92) v3(29.27,56.64) v3(29.52,21.69) v3(29.52,19.96) v3(29.65,57.21) v3(61.3,31.1) v3(61.3,30.2) v3(61.3,29.3) v3(62.2,31.1) v3(62.2,30.2) v3(62.2,29.3) v3(63.1,31.1) v3(63.1,30.2) v3(63.1,29.3) v3(63.3,41.31) v3(63.3,39.92) v4(2,38) v4(2.1,40) v4(2.1,36) v4(2.2,42) v4(2.2,34) v4(2.5,44) v4(2.5,32) v4(2.9,46) v4(2.9,30) v4(3.4,48) v4(3.4,28) v4(4,26) v4(4.1,50) v4(4.8,52) v4(4.8,24) v4(5.8,54) v4(5.8,22) v4(6.8,56) v4(6.8,20) v4(8,58) v4(8,18) v4(9.5,60) v4(9.5,16) v4(11.1,14) v4(11.2,62) v4(12.5,63.5) v4(12.5,12.5) v4(15.4,66) v4(15.4,10) v4(18.1,68) v4(18.1,8) v4(21.5,70) v4(21.6,6) v4(26.2,72) v4(26.2,4) v4(37.57,53.17) v4(38,74) v4(38,2) v4(49.8,72) v4(49.8,4) v4(54.4,6) v4(54.5,70) v4(57.9,68) v4(57.9,8) v4(60.6,66) v4(60.6,10) v4(63.5,63.5) v4(63.5,12.5) v4(64.8,62) v4(64.9,14) v4(66.5,60) v4(66.5,16) v4(68,58) v4(68,18) v4(69.2,56) v4(69.2,20) v4(70.2,54) v4(70.2,22) v4(71.2,52) v4(71.2,24) v4(71.9,50) v4(72,26) v4(72.6,48) v4(72.6,28) v4(73.1,46) v4(73.1,30) v4(73.5,44) v4(73.5,32) v4(73.8,42) v4(73.8,34) v4(73.9,40) v4(73.9,36) v4(74,38)
VDD33: length 91.9
  TOP w0.3: 35.59,33.3 35.59,33.81 36.08,34.3 38.2,34.3 38.7,34.8 38.7,35.8 U1.D6 ; 35.59,33.3 36.2,33.3 36.4,33.1 36.4,32.6 36.68,32.32 R2.1 ; 35.59,33.3 35.2,33.3 34.94,33.56 C3.1 ; C1.1 38.25,41 37.6,40.35 U1.E1
  TOP w0.5: C1.1 38.8,42.7 39.05,42.45 C2.1
  VCC w0.5: v2(61.43,40.6) 61.08,40.95 v3(61.08,41.77) v3(61.67,41.77) 61.67,40.84 v2(61.43,40.6) ; v2(61.43,40.6) 61.08,40.24 v3(61.08,39.33) v3(61.61,39.33) 61.61,40.42 v2(61.43,40.6)
  BOTTOM w0.2: U9.72 v3(25.4,46.8) ; U9.95 v3(40.2,50.1) ; U9.106 v3(45.7,50.1) ; U9.131 v3(50,35.8) ; U8.4 v2(61.43,40.6) ; U9.39 v3(25.5,30.3) ; U9.108 v3(46.7,50.1) ; v3(50.1,29.3) U9.144 ; v3(25.5,41.8) U9.62 ; U9.121 50.15,40.8 v3(50.2,40.85) ; U9.84 v3(34.7,50.1) ; v3(25.6,36.8) U9.52 ; v3(13.95,42) 13.95,42.65 14.3,43 U7.B1 ; U9.17 v3(38.7,25.9)
  BOTTOM w0.3: R29.2 53.27,45.88 v3(53.29,45.9) ; R39.2 52.07,30.17 51.9,30 51.28,30 51.13,29.85 C37.2 50.55,29.25 50.5,29.3 v3(50.1,29.3) ; 34.35,55.7 35.42,55.7 R21.2 v3(36.1,55.73) ; U10.6 v3(16.72,33.72) ; v3(16.72,33.72) 17.31,33.13 C32.1 C33.1 15.85,32.85 v3(16.72,33.72) ; C30.2 25.55,36.85 v3(25.6,36.8) ; R27.1 v3(14,46.15) R28.1 ; C27.2 v3(50.2,40.85) ; C31.2 50.05,35.85 v3(50,35.8) ; v3(25.4,46.8) 25.35,46.85 C22.2 ; C39.2 38.65,25.85 v3(38.7,25.9) ; v3(25.5,30.3) 25.45,30.25 C35.2 ; v3(25.5,41.8) 25.45,41.75 C25.2 ; U11.5 57.4,30.2 v3(57.3,30.1) 56.9,30.1 56.85,30.15 C36.1 56.49,30.49 56.75,30.75 C34.1 ; v3(13.95,42) 13.9,42.05 C24.2 ; R11.2 v3(44.55,60.73)
  BOTTOM w0.38: C18.2 45.65,50.15 v3(45.7,50.1) ; C19.2 40.15,50.15 v3(40.2,50.1) ; R26.1 v3(53.29,45.9) ; v3(34.7,50.1) 34.7,50.6 35.05,50.95 C20.2 ; v3(46.7,50.1) 46.7,50.5 46.85,50.65 C17.2 ; R35.1 v3(11.66,34.69)
  BOTTOM w0.5: R45.1 v3(33.65,22.9) ; R24.1 53.74,54.05 54.44,54.75 TP8.1 58.66,54.75 59.65,53.76 59.65,52.8 60.15,52.3 J3.1 ; U13.5 25.54,18.35 25.3,18.59 C42.1 24.75,18.64 24.15,19.24 R46.1 ; U12.1 v4(51.52,22.82) ; R41.1 22.4,27.8 21.91,27.31 Q1.2 ; L3.2 v4(31.2,22.69)
  vias: v3(30.8,53.37) v3(30.8,52.23) v3(31.3,53.1) v3(31.3,52.47) v3(31.8,53.38) v3(31.8,52.23)
VDD_CAM1: length 72.9
  VCC w1: J2.1 27.82,6.37 29.89,4.3 47.3,4.3 52.1,9.1 52.1,17 54.73,19.63 63.53,19.63 69.3,25.4 69.3,33.9 65.13,38.07 64.24,38.07 64.2,38.11 v3(64.05,38.11)
  vias: v2(64.01,38.63) v2(64.52,38.16) v3(64.48,38.65)
VDD_CAM2: length 59.5
  VCC w1: v3(30.9,70.96) 31.07,71.13 31.07,71.24 31.56,71.73 44.67,71.73 47.6,68.8 52.61,68.8 56.5,64.91 56.5,60.8 59.9,57.4 65.2,57.4 67.09,55.51 67.09,45.19 64.89,42.99 v3(64.52,42.99)
  vias: v2(64.04,43.05) v2(64.57,42.51) v3(29.96,70.96) v3(30.4,70.5) v3(31.4,70.5) v3(31.9,70.9) v3(64.09,42.51)
VSS: length 1.2
  BOTTOM w0.2: U9.71 v3(28.5,46.3)
BUS_SWITCH: length 2.8
  BOTTOM w0.15: U9.135 49.9,33.8 50.55,33.15 R36.1
CAM1_D0: length 60.2
  TOP w0.15: v2(58.3,28.2) 58,28.2 57.57,27.77 57.57,26.27 55.3,24 54.27,24 54.12,23.85 54.12,23.37 54.27,23.22 56.65,23.22 56.8,23.07 56.8,22.58 56.65,22.43 54.27,22.43 54.12,22.28 54.12,21.25 53.97,21.1 53.48,21.1 53.33,21.25 53.33,21.97 53.18,22.12 52.65,22.12 52.5,22.27 52.5,22.76 52.65,22.91 53.18,22.91 53.33,23.06 53.33,23.85 53.18,24 50.2,24 49.45,23.25 49.45,23.04 50.04,22.45 50.04,22.24 49.7,21.9 49.48,21.9 48.1,23.29 47.88,23.29 47.54,22.94 47.54,22.73 48.93,21.34 48.93,21.13 48.59,20.79 48.37,20.79 46.99,22.17 46.77,22.17 46.43,21.83 46.43,21.62 47.82,20.23 47.82,20.02 47.48,19.68 47.26,19.68 46.68,20.26 46.46,20.26 45.1,18.9 41.23,18.9 39.28,16.95 39.07,16.95 38.62,17.41 38.41,17.41 38.06,17.06 38.06,16.85 38.51,16.4 38.51,16.19 38.17,15.84 37.96,15.84 37.51,16.3 37.3,16.3 36.95,15.95 36.95,15.74 37.4,15.29 37.4,15.08 37.06,14.73 36.85,14.73 36.4,15.18 36.18,15.18 35.84,14.84 35.84,14.63 36.29,14.18 36.29,13.97 35.44,13.11 35.44,10.6
  BOTTOM w0.15: U11.1 v2(58.3,28.2)
CAM1_D1: length 59.9
  TOP w0.15: v2(58.3,29.2) 57.9,29.2 56.92,28.22 56.92,27.32 55.4,25.8 48.4,25.8 47.58,24.98 47.36,24.98 46.83,25.51 46.61,25.51 46.27,25.17 46.27,24.96 46.81,24.42 46.81,24.21 46.46,23.86 46.25,23.86 45.71,24.4 45.5,24.4 45.16,24.06 45.16,23.85 45.7,23.31 45.7,23.1 45.35,22.75 45.14,22.75 44.6,23.29 44.39,23.29 44.05,22.95 44.05,22.74 44.59,22.2 44.59,21.99 44.24,21.64 44.03,21.64 43.49,22.18 43.28,22.18 42.94,21.84 42.94,21.63 43.48,21.09 43.48,20.88 42.5,19.9 38.7,19.9 37.9,19.1 37.9,18.3 36.29,16.69 36.07,16.69 35.14,17.62 34.92,17.62 34.58,17.28 34.58,17.07 35.52,16.13 35.52,15.92 35.18,15.58 34.96,15.58 34.03,16.51 33.81,16.51 33.47,16.17 33.47,15.96 34.41,15.02 34.41,14.53 34.05,14.17 32.75,14.17 32.6,14.02 32.6,13.54 32.75,13.39 34.05,13.39 34.2,13.24 34.2,7.45 35.14,6.51 36.43,6.51 37.98,8.06
  BOTTOM w0.15: U11.3 v2(58.3,29.2)
CAM1_D2: length 60.8
  TOP w0.15: v2(58.2,30.8) 57.9,30.5 57.9,30.1 58,30 58.7,30 59,29.7 59,28.37 59.15,28.22 60.85,28.22 61,28.07 61,27.71 60.85,27.56 59.15,27.56 59,27.41 59,27.06 59.15,26.91 60.85,26.91 61,26.76 61,26.4 60.85,26.25 59.15,26.25 59,26.1 59,25.32 59.15,25.17 60.25,25.17 60.4,25.02 60.4,24.66 60.25,24.52 58.4,24.52 58.25,24.37 58.25,24.01 58.4,23.86 60.25,23.86 60.4,23.71 60.4,23.35 60.25,23.2 58.4,23.2 58.25,23.05 58.25,22.15 57.7,21.6 56.2,21.6 55,20.4 52.6,20.4 51.9,21.1 50.6,21.1 50.34,20.84 50.34,20.62 51.17,19.79 51.17,19.57 50.92,19.32 50.71,19.32 49.87,20.16 49.66,20.16 49.4,19.9 49.4,19.69 50.24,18.85 50.24,18.64 49.99,18.39 49.78,18.39 48.94,19.23 48.73,19.23 48.47,18.97 48.47,18.76 49.31,17.92 49.31,17.71 49.06,17.46 48.85,17.46 48.01,18.3 47.8,18.3 47.4,17.9 42.06,17.9 37.98,13.82 37.98,10.6
  BOTTOM w0.15: v2(58.2,30.8) 58.6,31.2 U11.7
CAM1_D3: length 60
  TOP w0.15: J2.6 37.98,5.52 32.98,5.52 31.68,6.82 31.68,16.18 37.5,22 41.5,22 46.1,26.6 47.16,26.6 47.31,26.75 47.31,27.05 47.46,27.2 47.95,27.2 48.1,27.05 48.1,26.75 48.25,26.6 48.73,26.6 48.88,26.75 48.88,27.05 49.03,27.2 49.52,27.2 49.67,27.05 49.67,26.75 49.82,26.6 50.3,26.6 50.45,26.75 50.45,27.05 50.6,27.2 51.09,27.2 51.24,27.05 51.24,26.75 51.39,26.6 53,26.6 54.5,28.1 54.5,29.4 53.96,29.94 53.96,32.16 54.3,32.5 v2(54.9,32.5)
  BOTTOM w0.15: v2(54.9,32.5) 58.3,32.5 58.6,32.2 U11.9
CAM1_D4: length 59.8
  TOP w0.15: J2.13 40.52,11.45 40.37,11.6 39.25,11.6 39.1,11.75 39.1,12.1 39.25,12.25 40.37,12.25 40.52,12.4 40.52,12.76 40.37,12.91 39.25,12.91 39.1,13.06 39.1,13.42 39.25,13.57 40.37,13.57 40.52,13.72 40.52,14.32 42.79,16.6 43.72,16.6 43.87,16.75 43.87,16.95 44.02,17.1 44.38,17.1 44.53,16.95 44.53,16.75 44.68,16.6 45.04,16.6 45.19,16.75 45.19,16.95 45.34,17.1 45.69,17.1 45.84,16.95 45.84,16.75 45.99,16.6 46.35,16.6 46.5,16.75 46.5,16.95 46.65,17.1 47.01,17.1 47.16,16.95 47.16,16.75 47.31,16.6 50.3,16.6 51.15,17.45 51.36,17.45 52.05,16.76 52.26,16.76 52.52,17.02 52.52,17.23 51.83,17.92 51.83,18.13 52.08,18.38 52.3,18.38 52.98,17.7 53.2,17.7 53.45,17.95 53.45,18.16 52.76,18.85 52.76,19.06 53.1,19.4 53.95,19.4 54.1,19.25 54.1,17.55 54.25,17.4 54.85,17.4 55,17.55 55,19.25 55.15,19.4 56.7,19.4 59.8,22.5 61.7,22.5 62.3,23.1 62.3,24.8 62.8,25.3 64.08,25.3 64.23,25.45 64.23,27.25 64.38,27.4 64.74,27.4 64.89,27.25 64.89,26.97 65.04,26.82 65.75,26.82 65.9,26.67 65.9,26.31 65.75,26.16 65.04,26.16 64.89,26.02 64.89,25.45 65.04,25.3 65.8,25.3 66.7,26.2 66.7,27.95 66.45,28.2 v2(66.1,28.2)
  BOTTOM w0.15: U11.27 v2(66.1,28.2)
CAM1_D5: length 60.5
  TOP w0.15: J2.7 41.83,9.29 41.83,13.31 44.01,15.5 44.43,15.5 44.58,15.35 44.58,14.65 44.73,14.5 45.09,14.5 45.24,14.65 45.24,15.35 45.39,15.5 45.75,15.5 45.9,15.35 45.9,14.75 46.05,14.6 46.41,14.6 46.56,14.75 46.56,15.35 46.71,15.5 47.07,15.5 47.22,15.35 47.22,14.75 47.37,14.6 47.72,14.6 47.87,14.75 47.87,15.35 48.02,15.5 48.42,15.5 48.57,15.35 48.57,14.65 48.72,14.5 50.39,14.5 50.54,14.65 50.54,15.35 50.69,15.5 51.05,15.5 51.2,15.35 51.2,14.35 51.35,14.2 51.71,14.2 51.86,14.35 51.86,15.35 52.01,15.5 52.37,15.5 52.52,15.35 52.52,14.45 52.67,14.3 53.02,14.3 53.17,14.45 53.17,15.35 53.32,15.5 54.22,15.5 60.02,21.3 64.2,21.3 64.4,21.5 64.4,21.71 63.26,22.85 63.26,23.06 63.51,23.31 63.72,23.31 64.86,22.17 65.07,22.17 65.33,22.43 65.33,22.64 64.19,23.78 64.19,23.99 64.44,24.24 64.65,24.24 65.79,23.1 66,23.1 67.44,24.54 67.44,28.86 66.9,29.4 v2(66.6,29.4)
  BOTTOM w0.15: v2(66.6,29.4) 66.2,29.4 66,29.2 U11.25
CAM1_D6: length 59.9
  TOP w0.15: J2.12 43.06,11.4 43.95,12.3 45.54,12.3 45.69,12.45 45.69,13.55 45.84,13.7 46.32,13.7 46.47,13.55 46.47,12.45 46.62,12.3 47.11,12.3 47.26,12.45 47.26,13.55 47.41,13.7 47.89,13.7 48.04,13.55 48.04,12.45 48.19,12.3 49,12.3 50.6,10.7 51.15,10.7 51.3,10.85 51.3,11.74 51.15,11.89 50.35,11.89 50.2,12.04 50.2,12.52 50.35,12.67 51.15,12.67 51.3,12.82 51.3,13.1 51.5,13.3 52.35,13.3 52.5,13.15 52.5,11.14 52.94,10.7 53.4,10.7 54.48,11.78 54.48,12 53.65,12.83 53.65,13.05 53.99,13.39 54.2,13.39 55.04,12.55 55.25,12.55 55.59,12.89 55.59,13.11 54.76,13.94 54.76,14.16 55.1,14.5 55.31,14.5 56.15,13.66 56.36,13.66 56.6,13.9 56.6,16.3 60.7,20.4 64.57,20.4 68.1,23.93 68.1,29.8 66.7,31.2 v2(66,31.2)
  BOTTOM w0.15: v2(66,31.2) U11.21
CAM1_D7: length 59.2
  TOP w0.15: v2(66,32.2) 67.9,32.2 68.82,31.28 68.82,23.59 64.83,19.6 61.3,19.6 57.8,16.1 57.8,12.9 57.46,12.56 57.46,12.35 58.1,11.71 58.1,11.5 57.76,11.16 57.54,11.16 56.91,11.79 56.69,11.79 56.35,11.45 56.35,11.24 56.99,10.6 56.99,10.39 56.65,10.05 56.43,10.05 55.8,10.68 55.58,10.68 55.24,10.34 55.24,10.13 55.88,9.49 55.88,9.28 55.54,8.94 55.32,8.94 54.69,9.57 54.17,9.57 54,9.4 53.49,9.4 53.34,9.25 53.34,7.75 53.19,7.6 52.7,7.6 52.55,7.75 52.55,9.25 52.4,9.4 51.92,9.4 51.77,9.25 51.77,7.75 51.62,7.6 51.13,7.6 50.98,7.75 50.98,9.25 50.83,9.4 50.45,9.4 50.3,9.25 50.3,7.75 50.15,7.6 49.65,7.6 49.5,7.75 49.5,9.16 49.26,9.4 46.94,9.4 45.6,8.06
  BOTTOM w0.15: U11.19 v2(66,32.2)
CAM1_HSYNC: length 57.8
  VCC w0.15: v2(11,38.9) 10.1,38 10.1,35.2 11.9,33.4 11.9,32.4 13,31.3 16.1,31.3 20.7,26.7 20.7,16.1 24.53,12.27 27.93,12.27 29.09,11.11 29.09,7.32 30.1,6.31 31.95,6.31 32.9,7.26 J2.3
  BOTTOM w0.15: U10.16 17.37,40.23 16.4,41.2 13.3,41.2 v2(11,38.9)
CAM1_PCLK: length 59.8
  VCC w0.15: v2(19.5,36.02) 19.98,36.02 20.4,35.6 20.4,31 26.2,25.2 26.2,17.8 29,15 32.83,15 32.98,15.15 32.98,15.95 33.13,16.1 33.36,16.1 33.51,15.95 33.51,15.15 33.66,15 33.89,15 34.04,15.15 34.04,15.95 34.19,16.1 34.42,16.1 34.57,15.95 34.57,15.15 34.72,15 34.95,15 35.1,15.15 35.1,15.95 35.25,16.1 35.49,16.1 35.64,15.95 35.64,15.15 35.79,15 36.02,15 36.17,15.15 36.17,15.95 36.32,16.1 36.55,16.1 36.7,15.95 36.7,15.15 36.85,15 37.08,15 37.23,15.15 37.23,15.95 37.38,16.1 37.61,16.1 37.76,15.95 37.76,15.15 37.91,15 38.14,15 38.29,15.15 38.29,15.95 38.44,16.1 38.67,16.1 38.82,15.95 38.82,15.15 38.97,15 39.2,15 39.35,15.15 39.35,15.95 39.5,16.1 39.73,16.1 39.88,15.95 39.88,15.15 40.03,15 40.26,15 40.41,15.15 40.41,15.95 40.56,16.1 40.8,16.1 40.95,15.95 40.95,15.15 41.1,15 41.84,15 45.6,11.25 45.6,10.6
  BOTTOM w0.15: v2(19.5,36.02) 19.48,36.02 19.4,35.95 18.8,35.95 18.72,36.02 U10.4
CAM1_PWDN: length 25.3
  BOTTOM w0.15: J2.10 48.14,13.06 45.6,15.6 v1(41.6,15.6) 38.8,15.6 37.7,16.7 37.7,25.8 38.2,26.3 U9.18
CAM1_PWR_EN: length 16.2
  TOP w0.15: v2(58.85,39.9) 58.4,39.9 57.9,39.4 57.9,38.8 57.1,38 v1(56.7,38) 56.2,38 55.4,38.8 v2(52.8,38.8)
  BOTTOM w0.15: v2(58.85,39.9) 59.15,40.2 U8.3 ; v2(52.8,38.8) U9.125
  BOTTOM w0.2: R33.2 v2(58.85,39.9)
CAM1_RST: length 29.7
  BOTTOM w0.15: 35.44,8.06 33.64,6.26 29.83,6.26 29.09,7.01 29.09,13.59 32.5,17 v1(32.5,21) 32.5,25.1 33.7,26.3 U9.27
CAM1_VSYNC: length 60.2
  VCC w0.15: v2(13.3,37.97) 11.98,37.97 10.96,36.95 10.96,35.84 11.2,35.6 12.1,35.6 12.8,34.9 12.8,33.1 13.6,32.3 17,32.3 21.82,27.48 21.82,25.63 21.97,25.48 23.55,25.48 23.7,25.33 23.7,24.84 23.55,24.69 21.97,24.69 21.82,24.54 21.82,24.06 21.97,23.91 23.55,23.91 23.7,23.76 23.7,23.27 23.55,23.12 21.97,23.12 21.82,22.97 21.82,22.49 21.97,22.34 23.55,22.34 23.7,22.19 23.7,21.7 23.55,21.55 21.97,21.55 21.82,21.4 21.82,20.92 21.97,20.77 23.55,20.77 23.7,20.62 23.7,20.13 23.55,19.98 21.97,19.98 21.82,19.83 21.82,17.08 25.3,13.6 29.5,13.6 31.6,11.5 31.6,9.3 J2.2
  BOTTOM w0.15: U10.12 v2(13.3,37.97)
CAM2_D0: length 66.2
  TOP w0.15: J1.26 v2(41.2,68.1)
  VCC w0.15: v2(61.7,25.59) 58.05,25.59 57.9,25.74 57.9,27.35 57.75,27.5 56.95,27.5 56.8,27.35 56.8,25.9 56.48,25.59 55.6,25.59 54.4,26.79 54.4,29.7 53.6,30.5 53.6,36.6 52.2,38 52.2,39.2 53.2,40.2 53.2,44.7 51.7,46.2 51.7,51.4 46.6,56.5 46.6,59.8 44.47,61.93 40.59,61.93 39.1,63.41 39.1,66 39.9,66.8 40.78,66.8 41.2,67.22 v2(41.2,68.1)
  BOTTOM w0.15: U11.33 v2(61.7,25.59)
CAM2_D1: length 63.7
  TOP w0.15: J1.25 v2(40.8,67.9)
  VCC w0.15: v2(40.8,67.9) 40.8,67.66 40.44,67.3 39.4,67.3 38.5,66.4 38.5,62.53 39.83,61.2 42.6,61.2 45.3,58.5 45.3,56.47 50.4,51.37 50.4,46.18 52.4,44.18 52.4,41.6 51.5,40.7 51.5,37.5 52.12,36.88 52.12,29.78 53.1,28.8 53.1,26.6 54.68,25.02 v2(61.2,25.02)
  BOTTOM w0.15: v2(61.2,25.02) U11.34
CAM2_D2: length 66.4
  TOP w0.15: J1.28 v2(42,68.17)
  VCC w0.15: v2(42,68.17) 42,66.39 41.8,66.19 41.8,65.2 42.27,64.73 42.27,64.52 41.53,63.78 41.53,63.57 41.79,63.31 42,63.31 42.74,64.05 42.95,64.05 43.61,63.39 47.21,63.39 49.29,61.31 49.29,56.11 55.4,50 55.4,38.4 54.5,37.5 54.5,34.7 56,33.2 56,31.45 56.15,31.3 56.95,31.3 57.1,31.45 57.1,33.5 55.9,34.7 55.9,37.3 55.75,37.45 55.47,37.45 55.32,37.3 v2(55.32,37.1)
  BOTTOM w0.15: v2(55.32,37.1) 55.32,36.28 56.4,35.2 60.7,35.2 61.2,34.7 U11.12
CAM2_D3: length 65.7
  TOP w0.15: J1.27 v2(41.6,67.9)
  VCC w0.15: v2(54.2,38.2) 54.2,38.76 54.35,38.91 54.45,38.91 54.6,39.06 54.6,39.42 54.45,39.57 53.96,39.57 53.81,39.72 53.81,40.08 53.96,40.23 54.45,40.23 54.6,40.38 54.6,40.74 54.45,40.89 53.96,40.89 53.81,41.04 53.81,41.4 53.96,41.55 54.45,41.55 54.6,41.7 54.6,42.05 54.45,42.2 54.35,42.2 54.2,42.35 54.2,42.8 54.7,43.3 54.7,44.5 54.2,45 54.2,47.13 54.05,47.28 52.55,47.28 52.4,47.43 52.4,47.79 52.55,47.94 54.05,47.94 54.2,48.09 54.2,48.45 54.05,48.6 52.55,48.6 52.4,48.75 52.4,49.1 52.55,49.25 54.05,49.25 54.2,49.4 54.2,50.1 53.76,50.54 53.55,50.54 53.42,50.42 53.21,50.42 52.96,50.67 52.96,50.88 53.08,51.01 53.08,51.22 47.87,56.43 47.87,59.93 47.27,60.53 47.27,60.74 47.91,61.38 47.91,61.59 47.65,61.85 47.44,61.85 46.8,61.21 46.59,61.21 46.34,61.46 46.34,61.67 46.98,62.31 46.98,62.52 46.72,62.78 46.51,62.78 45.87,62.14 45.66,62.14 45.1,62.7 41.3,62.7 39.7,64.3 39.7,65.7 40.2,66.2 40.89,66.2 41.6,66.91 v2(41.6,67.9)
  BOTTOM w0.15: v2(54.2,38.2) 54.7,37.7 55.9,37.7 57.7,35.9 60.8,35.9 61.7,35 U11.13
CAM2_D4: length 64.8
  TOP w0.15: J1.30 v2(42.8,68.17)
  VCC w0.15: v2(42.8,68.17) 42.8,66.6 44.63,64.77 49.03,64.77 51.4,62.4 51.4,59.5 54.1,56.8 54.1,54.1 55.1,53.1 58.6,53.1 59.7,52 59.7,48.2 57.13,45.63 57.13,35.96 60.36,32.74 60.36,28.94 60.9,28.4 63.85,28.4 64,28.25 64,27.55 63.85,27.4 61.45,27.4 61.2,27.15 61.2,26.7 61.45,26.45 62.57,26.45 v2(62.7,26.57)
  BOTTOM w0.15: v2(62.7,26.57) U11.31
CAM2_D5: length 64.7
  TOP w0.15: J1.29 v2(42.4,67.91)
  VCC w0.15: v2(63.2,26.21) 62.9,25.91 62.9,25.4 63.1,25.2 63.9,25.2 64.1,25.4 64.1,26.15 64.25,26.3 64.85,26.3 65,26.15 65,25.4 64.1,24.5 62.6,24.5 62.2,24.9 62.2,25.8 61.95,26.05 60.94,26.05 59.7,27.29 59.7,31.89 56.5,35.09 56.5,50.2 50.35,56.35 50.35,61.85 48.1,64.1 44.1,64.1 42.4,65.8 v2(42.4,67.91)
  BOTTOM w0.15: v2(63.2,26.21) U11.30
CAM2_D6: length 64.8
  TOP w0.15: v2(43.6,68.17) J1.32
  VCC w0.15: v2(43.6,68.17) 43.6,67.6 44.93,66.27 51.85,66.27 53.9,64.23 53.9,60.7 63.05,51.55 63.05,48.15 63.2,48 65.25,48 65.4,47.85 65.4,47.49 65.25,47.34 63.2,47.34 63.05,47.19 63.05,46.83 63.2,46.68 65.25,46.68 65.4,46.53 65.4,46.17 65.25,46.02 63.2,46.02 63.05,45.87 63.05,44.25 61.8,43 60.5,43 59.8,42.3 59.8,38.6 60.3,38.1 62.5,38.1 62.8,37.8 62.8,36.9 62.47,36.57 61.35,36.57 61.2,36.42 61.2,36.06 61.35,35.91 63.05,35.91 63.2,35.76 v2(63.2,34.4)
  BOTTOM w0.15: v2(63.2,34.4) U11.16
CAM2_D7: length 66.1
  TOP w0.15: J1.31 v2(43.2,67.9)
  VCC w0.15: v2(43.2,67.9) 43.2,67.2 44.7,65.7 49.9,65.7 52.82,62.78 52.82,60.38 60.6,52.6 60.6,48 58,45.4 58,36.6 58.7,35.9 58.93,35.9 59.08,35.75 59.08,35.05 59.23,34.9 59.59,34.9 59.74,35.05 59.74,35.75 59.89,35.9 60.25,35.9 60.4,35.75 60.4,35.05 60.55,34.9 60.95,34.9 61.1,34.75 61.1,32.9 61.8,32.2 62.15,32.2 62.3,32.35 62.3,32.75 62.45,32.9 62.81,32.9 62.96,32.75 62.96,32.35 63.11,32.2 63.47,32.2 63.62,32.35 63.62,32.75 63.77,32.9 64.12,32.9 64.27,32.75 64.27,32.35 64.42,32.2 65,32.2 65.2,32.4 65.2,33.35 65.05,33.5 62.24,33.5 62.09,33.65 62.09,34.79 62.24,34.94 62.55,34.94 62.7,34.79 v2(62.7,34.1)
  BOTTOM w0.15: U11.15 v2(62.7,34.1)
CAM2_HSYNC: length 66.2
  TOP w0.15: v2(15.42,40.1) 15.42,40.5 15.62,40.7 19.6,40.7 21.2,42.3 21.2,45.6 21.8,46.2 21.8,46.6 v1(22.52,47.32) 22.9,47.7 23.3,47.7 27.5,51.9 27.5,59.1 29.2,60.8 29.51,60.8 29.66,60.65 29.66,59.25 29.81,59.1 30.17,59.1 30.32,59.25 30.32,60.65 30.47,60.8 30.83,60.8 30.98,60.65 30.98,59.25 31.13,59.1 31.49,59.1 31.64,59.25 31.64,60.65 31.79,60.8 32.14,60.8 32.29,60.65 32.29,59.25 32.44,59.1 32.8,59.1 32.95,59.25 32.95,60.65 33.1,60.8 34.38,60.8 34.53,60.65 34.53,60.45 34.68,60.3 35.03,60.3 35.18,60.45 35.18,60.65 35.33,60.8 36.92,60.8 37.07,60.65 37.07,58.95 37.22,58.8 37.58,58.8 37.73,58.95 37.73,60.65 37.88,60.8 38.24,60.8 38.39,60.65 38.39,58.95 38.54,58.8 38.9,58.8 39.05,58.95 39.05,60.65 39.2,60.8 41.4,60.8 43.8,63.2 43.8,64.5 43.6,64.7 J1.39
  BOTTOM w0.15: U10.13 v2(15.42,40.1)
CAM2_KEY1: length 5.2
  TOP w0.15: v2(40,67.9) J1.48
  BOTTOM w0.15: TP1.1 41.7,70.2 40,68.5 v2(40,67.9)
CAM2_KEY2: length 4.5
  TOP w0.15: J1.50 v2(39.2,67.9)
  BOTTOM w0.15: v2(39.2,67.9) TP2.1
CAM2_KEY3: length 5.2
  TOP w0.15: J1.52 v2(38.4,67.9)
  BOTTOM w0.15: TP3.1 36.7,70.3 38.4,68.6 v2(38.4,67.9)
CAM2_KEY4: length 7
  TOP w0.15: v2(37.8,67.9) 37.6,67.7 J1.54
  BOTTOM w0.15: TP4.1 34.2,70.2 35.3,69.1 36.9,69.1 37.8,68.2 v2(37.8,67.9)
CAM2_PCLK: length 66.1
  TOP w0.15: J1.41 42.8,64.5 41.8,63.5 40.4,63.5 39.4,64.5 35.47,64.5 35.32,64.65 35.32,64.95 35.17,65.1 34.81,65.1 34.66,64.95 34.66,64.65 34.51,64.5 34.16,64.5 34.01,64.65 34.01,64.95 33.86,65.1 33.5,65.1 33.35,64.95 33.35,64.65 33.2,64.5 32.7,64.5 32.3,64.1 32.09,64.1 31.65,64.54 31.44,64.54 31.18,64.28 31.18,64.07 31.62,63.64 31.62,63.42 30.5,62.3 27.4,62.3 26.87,61.77 26.66,61.77 25.97,62.46 25.76,62.46 25.51,62.21 25.51,62 26.2,61.31 26.2,61.1 25.5,60.4 25.5,59.86 25.35,59.71 23.55,59.71 23.4,59.56 23.4,59.2 23.55,59.05 25.35,59.05 25.5,58.9 25.5,58.55 25.35,58.4 23.55,58.4 23.4,58.25 23.4,57.89 23.55,57.74 25.35,57.74 25.5,57.59 25.5,54.57 25.35,54.42 23.15,54.42 23,54.27 23,53.91 23.15,53.76 25.35,53.76 25.5,53.61 25.5,52.6 23.6,50.7 21.9,50.7 v1(21.5,50.3) 21,49.8 21,48.6 20.3,47.9 20.3,47.4 19.79,46.89 19.79,43.09 v2(18.6,41.9)
  BOTTOM w0.15: U10.1 v2(18.6,41.9)
CAM2_PWR_EN: length 15.5
  TOP w0.15: v2(58.9,41.1) 57.6,41.1 v1(56.85,40.35) 55.8,39.3 v2(53.2,39.3)
  BOTTOM w0.15: U8.5 59,41 v2(58.9,41.1) ; U9.124 v2(53.2,39.3)
  BOTTOM w0.2: v2(58.9,41.1) 58.9,41.98 R31.2
CAM2_RS232_RX: length 11.4
  TOP w0.15: v2(36.6,68) 36.8,68.2 J1.15
  BOTTOM w0.15: TP5.1 29.7,69.3 32.1,66.9 36.3,66.9 36.6,67.2 v2(36.6,68)
CAM2_RS232_TX: length 11.4
  TOP w0.15: v2(37.2,68) J1.16
  BOTTOM w0.15: TP6.1 31.3,66.8 31.7,66.4 36.6,66.4 37.2,67 v2(37.2,68)
CAM2_VSYNC: length 66.2
  TOP w0.15: v2(11.8,36.4) 11.8,38.5 14.6,41.3 19.1,41.3 20.6,42.8 20.6,46.2 21.1,46.7 21.1,47.6 v1(22.68,49.18) 23.1,49.6 24,49.6 26.5,52.1 26.5,59.8 28.3,61.6 32.95,61.6 33.1,61.75 33.1,62.15 33.25,62.3 34.43,62.3 34.58,62.45 34.58,63.05 34.73,63.2 35.09,63.2 35.24,63.05 35.24,62.45 35.39,62.3 35.7,62.3 36.2,61.8 36.82,61.8 36.97,61.95 36.97,63.25 37.12,63.4 37.48,63.4 37.63,63.25 37.63,61.95 37.78,61.8 38.14,61.8 38.29,61.95 38.29,63.25 38.44,63.4 38.8,63.4 38.95,63.25 38.95,61.95 39.1,61.8 39.58,61.8 39.73,61.95 39.73,62.65 39.88,62.8 40.23,62.8 40.38,62.65 40.38,61.95 40.53,61.8 41.6,61.8 43.2,63.4 J1.40
  BOTTOM w0.15: v2(11.8,36.4) 12.18,36.02 U10.9
DAY_NIGHT: length 14
  BOTTOM w0.15: U9.100 42.7,51.95 44.55,53.8 v1(44.55,57.9) R11.1 44.53,59.03 R12.2 42.67,59.03 42.4,59.3 U3.C2
DCMI_D0: length 47.8
  TOP w0.15: v2(40.7,47.3) 40.7,43.4 44.81,39.29 44.81,35.09 46.1,33.8 48.2,33.8 49.7,32.3 49.7,32.02 49.85,31.87 51.15,31.87 51.3,31.72 51.3,30.85 51.15,30.7 49.85,30.7 49.7,30.55 49.7,30.3 50,30 52.3,30 52.6,30.3 52.6,31.2 51.9,31.9 51.9,33.35 52.25,33.7 55,33.7 55.6,33.1 55.6,28.3 v2(56.1,27.8)
  BOTTOM w0.15: U9.96 v2(40.7,47.3) ; U11.36 60.2,26.77 59.73,26.3 57.6,26.3 v2(56.1,27.8)
DCMI_D1: length 47.6
  TOP w0.15: v2(56.5,28.7) 56.2,29 56.2,30.81 56.39,31 57.14,31 57.29,31.15 57.29,31.49 57.14,31.64 56.26,31.64 56.1,31.8 56.1,32.29 56.21,32.4 57.2,32.4 57.39,32.59 57.39,32.98 57.24,33.13 56.3,33.13 56.07,33.35 56.07,33.54 56.71,34.18 56.71,34.39 56.46,34.64 56.25,34.64 55.61,34 55.4,34 55.2,34.2 54.92,34.2 54.77,34.35 54.77,34.85 54.62,35 54.27,35 54.11,34.85 54.11,34.35 53.97,34.2 53.69,34.2 53.39,34.5 53.03,34.5 52.73,34.2 51.8,34.2 51.2,33.6 51.2,32.55 51.05,32.4 50.4,32.4 50.2,32.6 50.2,33.5 49.5,34.2 46.5,34.2 45.26,35.44 45.26,40.71 45.06,40.9 44.85,40.9 44.58,40.63 44.37,40.63 44.11,40.89 44.11,41.1 44.38,41.37 44.38,41.58 44.13,41.83 43.92,41.83 43.65,41.56 43.44,41.56 43.18,41.82 43.18,42.03 43.45,42.3 43.45,42.51 43.2,42.76 42.99,42.76 42.72,42.49 42.51,42.49 42.25,42.75 42.25,42.96 42.52,43.23 42.52,43.44 41.2,44.76 v2(41.2,47.72)
  BOTTOM w0.15: U11.2 v2(56.5,28.7) ; v2(41.2,47.72) U9.97
DCMI_D2: length 47.9
  TOP w0.15: v2(41.7,47.3) 41.7,45.19 45.71,41.18 45.71,35.59 46.7,34.6 50.8,34.6 51.4,35.2 53.3,35.2 53.8,35.7 57.3,35.7 57.9,35.1 57.9,33.9 58.4,33.4 63.3,33.4 63.59,33.11 63.59,32.09 63.4,31.9 63.01,31.9 62.86,32.05 62.86,32.75 62.71,32.9 62.36,32.9 62.21,32.75 62.21,32.05 62.06,31.9 61.7,31.9 61.55,32.05 61.55,32.75 61.4,32.9 61.04,32.9 60.89,32.75 60.89,32.05 60.74,31.9 59.6,31.9 59.4,32.1 59.4,32.5 59.2,32.7 58.3,32.7 57.98,32.38 57.98,32.02 v2(58.3,31.7)
  BOTTOM w0.15: U11.8 v2(58.3,31.7) ; v2(41.7,47.3) U9.98
DCMI_D3: length 47.6
  TOP w0.15: v2(42.2,47.72) 42.2,45.71 46.22,41.69 46.22,35.78 47,35 50.1,35 51.6,36.5 58.1,36.5 58.7,35.9 61,35.9 61.7,36.6 62.08,36.6 62.23,36.75 62.23,38.25 62.38,38.4 62.74,38.4 62.89,38.25 62.89,36.75 63.04,36.6 65.3,36.6 65.71,36.19 65.71,35.41 65.2,34.9 64.5,34.9 64,35.4 62.3,35.4 61.7,34.8 60.39,34.8 60.2,34.61 v2(60.2,34.1)
  BOTTOM w0.15: U9.99 v2(42.2,47.72) ; v2(60.2,34.1) U11.10
DCMI_D4: length 47.2
  BOTTOM w0.15: U9.112 50.2,45.3 50.6,44.9 50.6,43.7 51.5,42.8 53.1,42.8 53.8,42.1 53.8,31.3 53.2,30.7 53.2,27.7 53.89,27.01 54.1,27.01 54.74,27.65 54.95,27.65 55.2,27.4 55.2,27.19 54.56,26.55 54.56,26.34 54.82,26.08 55.03,26.08 55.67,26.72 55.88,26.72 56.13,26.47 56.13,26.26 55.49,25.62 55.49,25.41 55.75,25.15 55.96,25.15 56.6,25.79 56.81,25.79 57.06,25.54 57.06,25.33 56.42,24.69 56.42,24.48 56.65,24.25 57.97,24.25 58.12,24.4 58.12,25.35 58.27,25.5 58.62,25.5 58.77,25.35 58.77,24.4 58.92,24.25 59.28,24.25 59.43,24.4 59.43,25.35 59.58,25.5 59.94,25.5 60.09,25.35 60.09,24.4 60.24,24.25 63.15,24.25 64.2,25.3 U11.28
DCMI_D5: length 48.6
  TOP w0.15: v2(49.7,42.8) 52.36,42.8 52.51,42.65 52.51,41.15 52.66,41 53.02,41 53.17,41.15 53.17,42.65 53.32,42.8 53.68,42.8 53.83,42.65 53.83,41.15 53.98,41 54.34,41 54.49,41.15 54.49,42.65 54.64,42.8 55,42.8 55.15,42.65 55.15,41.15 55.3,41 55.65,41 55.8,41.15 55.8,42.65 55.95,42.8 56.67,42.8 56.82,42.65 56.82,42.15 56.97,42 57.33,42 57.48,42.15 57.48,42.65 57.63,42.8 57.99,42.8 58.14,42.65 58.14,42.15 58.29,42 58.64,42 58.79,42.15 58.79,42.65 58.94,42.8 61,42.8 62.97,44.77 65.03,44.77 66.4,43.4 66.4,34.5 65.1,33.2 65.1,30.9 65.9,30.1 65.9,29.4 66.4,28.9 v2(66.4,28.7)
  BOTTOM w0.15: U9.117 v2(49.7,42.8) ; v2(66.4,28.7) U11.26
